# Altium PCB Copy of PCB_Design.PcbDoc
Units mil, origin at the board's own origin, x right, y up, seen from the top; angles counter-clockwise.
Board outline 3200 x 3200 mil, 4 copper layers (L1, L2, L3, L4), stack 1.553 mil thick; 83 components, 55 nets, 293 pads, 204 vias.
Unrouted connection lines stored in the file: 4.
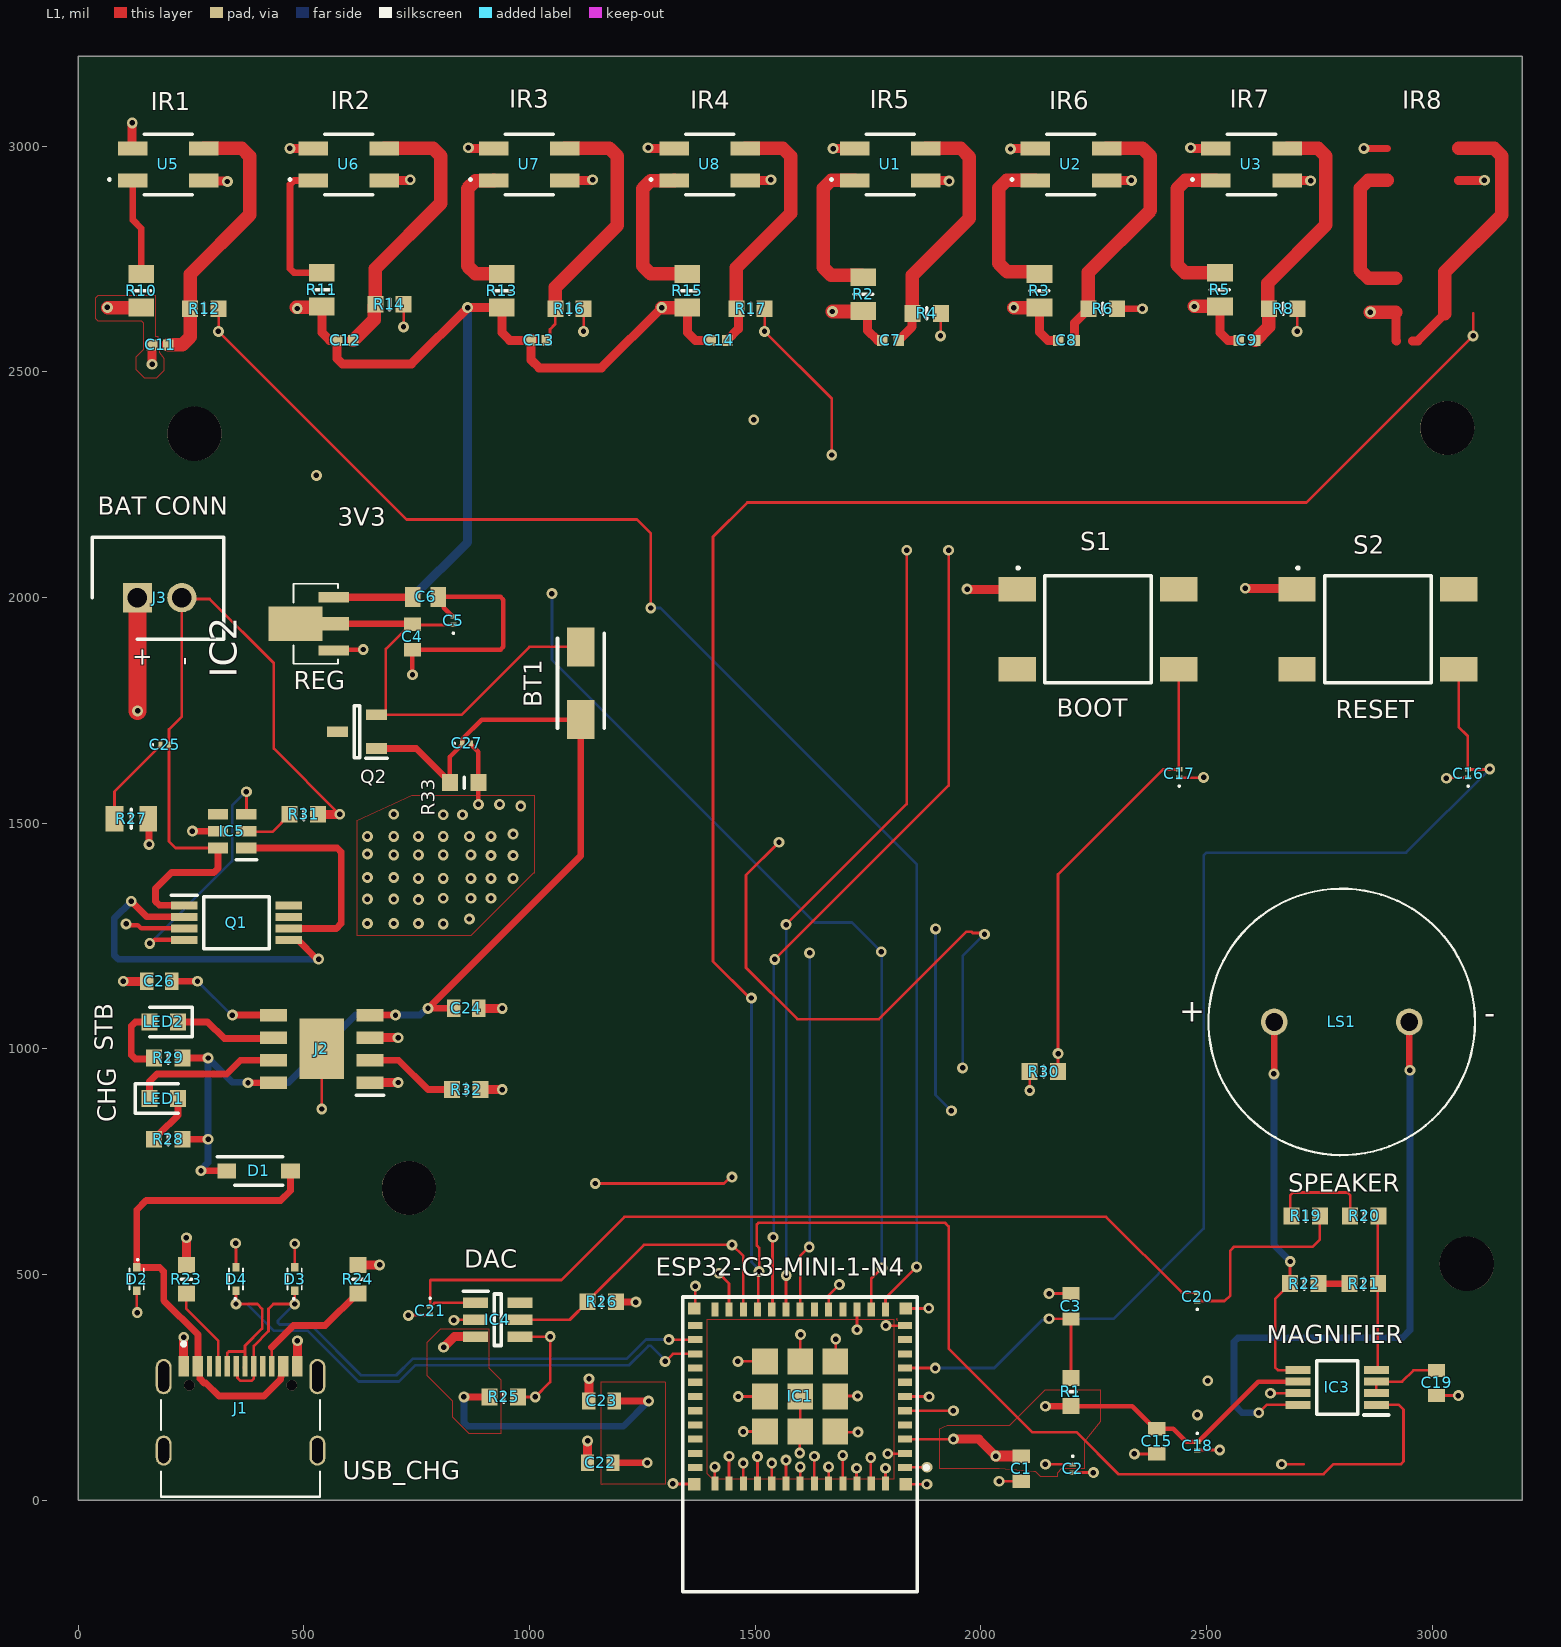
[diagram p0: L1 view]
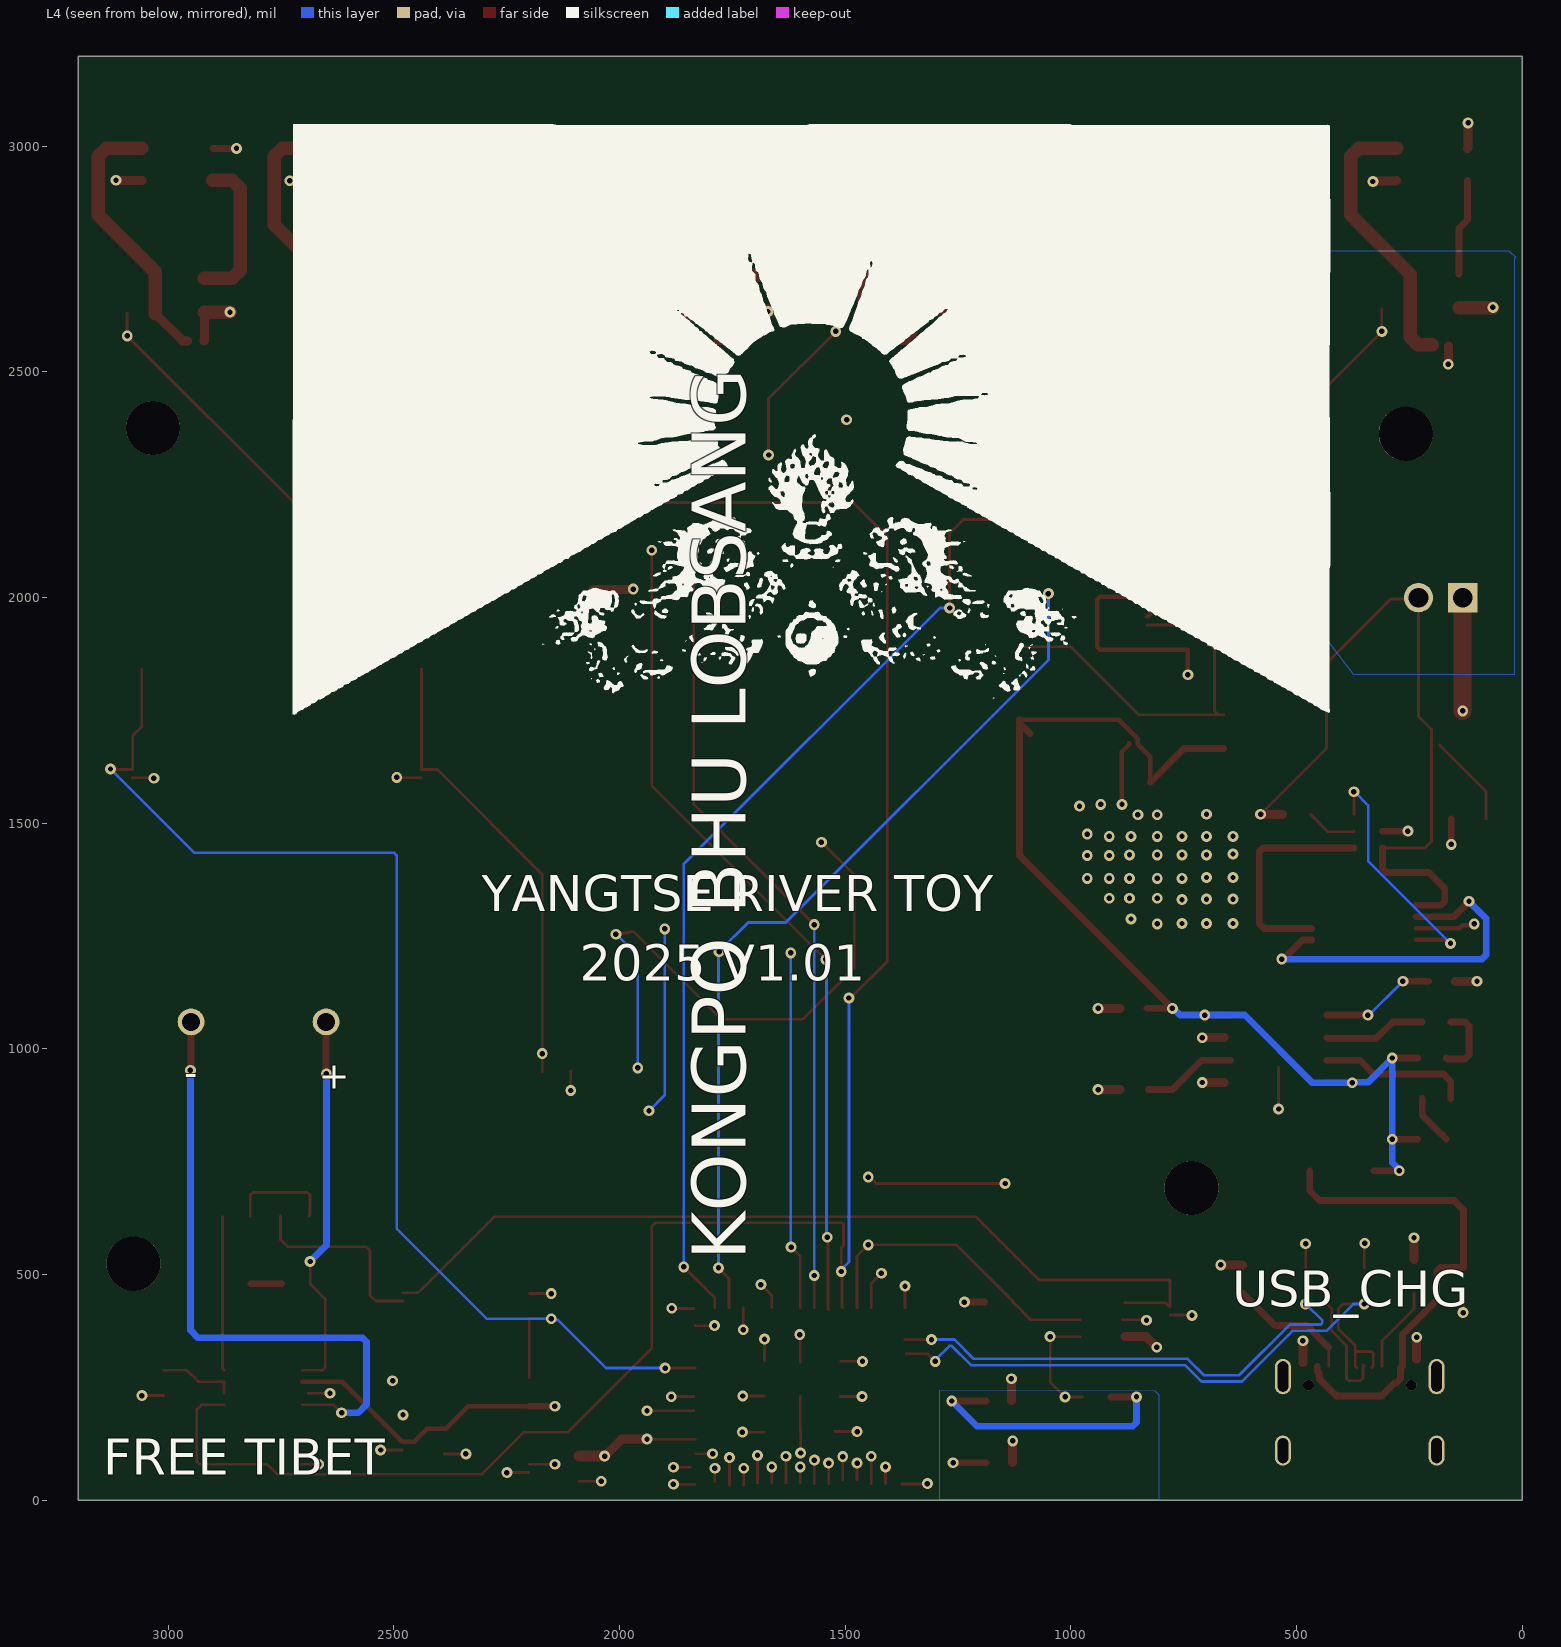
[diagram p1: L4 view, seen from below]
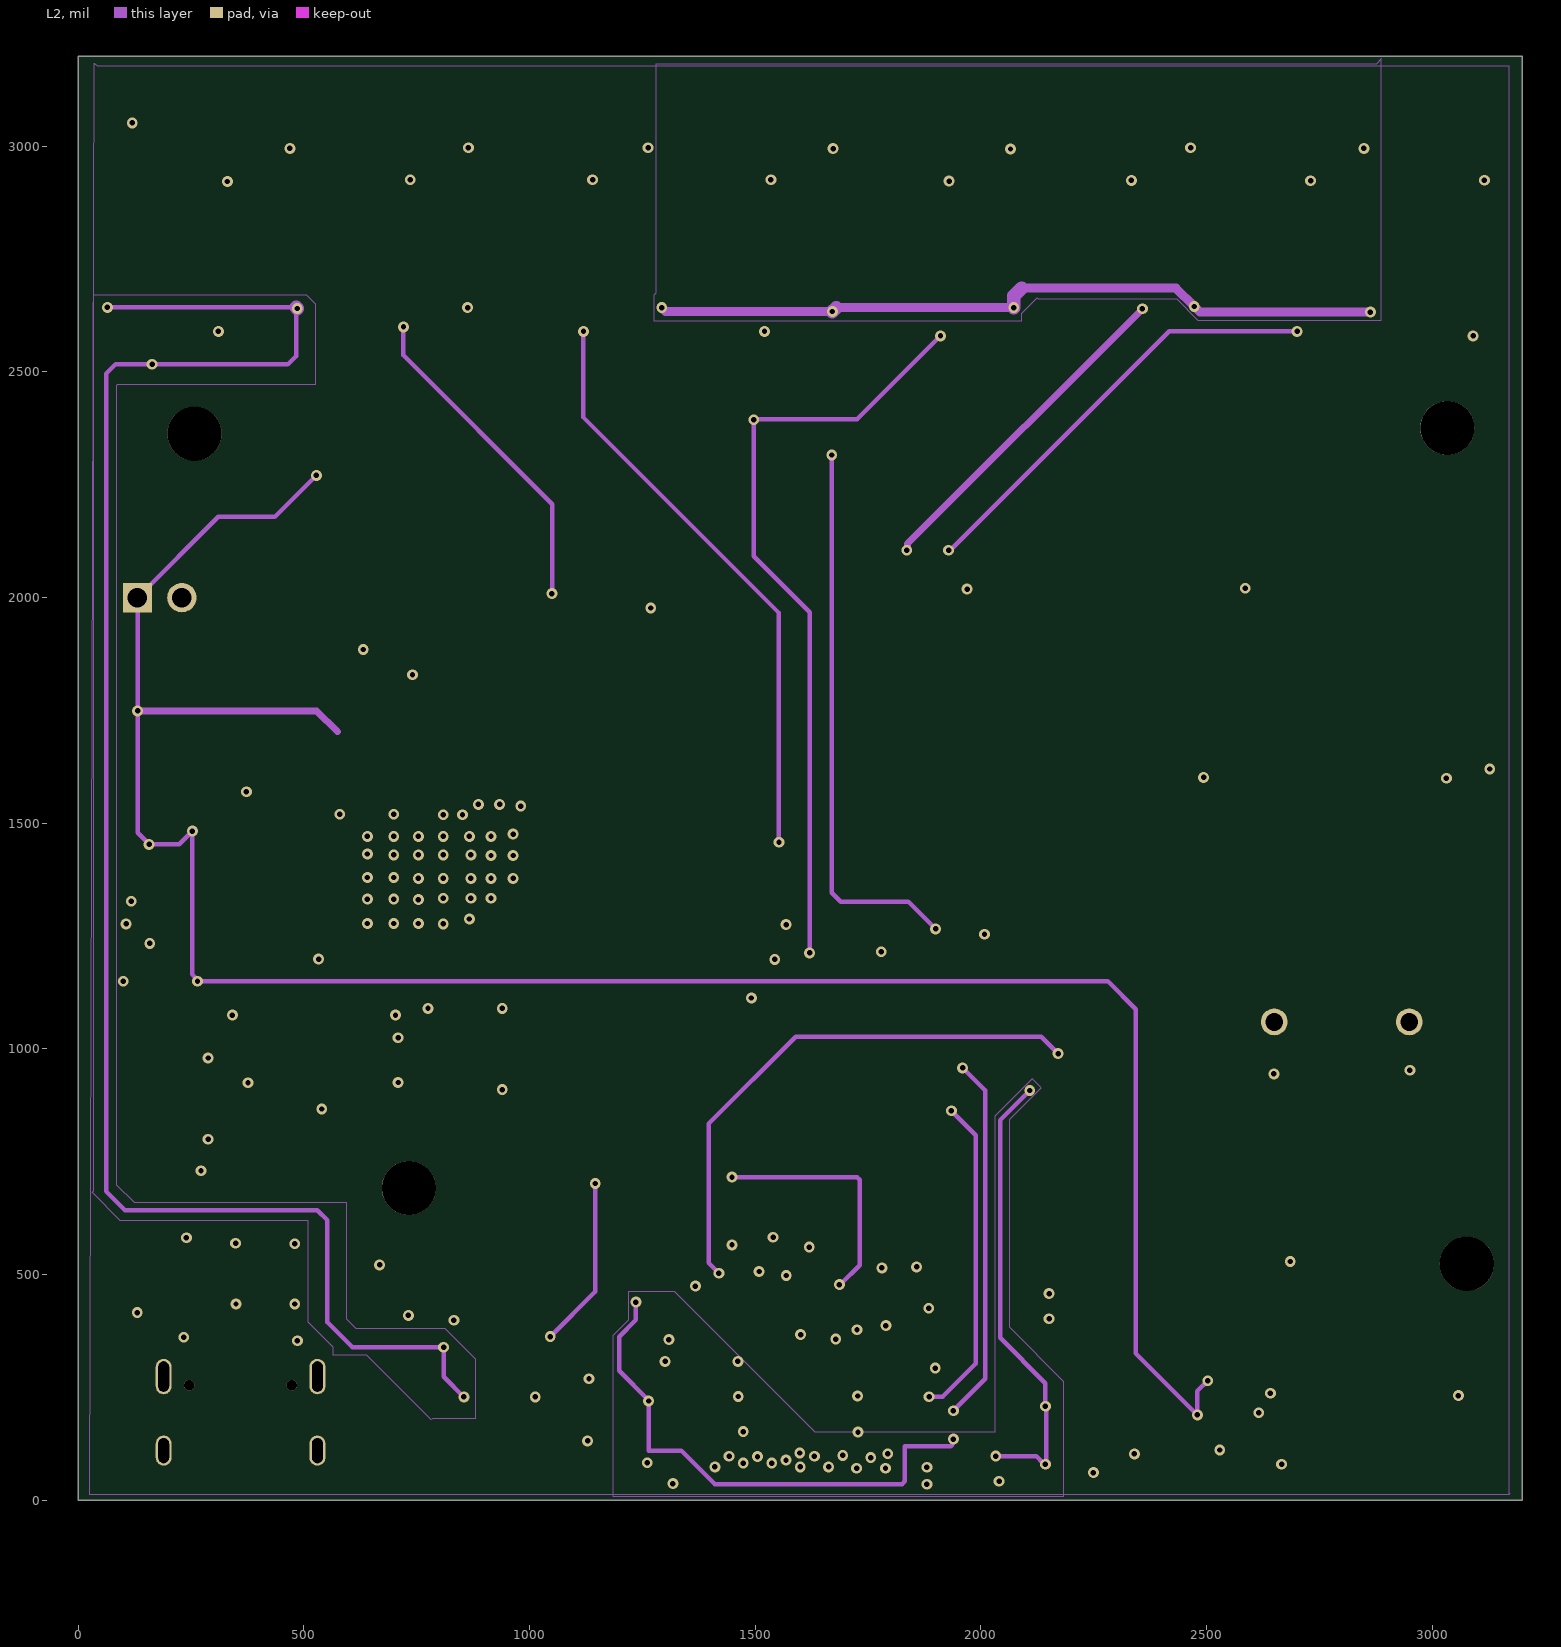
[diagram p2: L2]
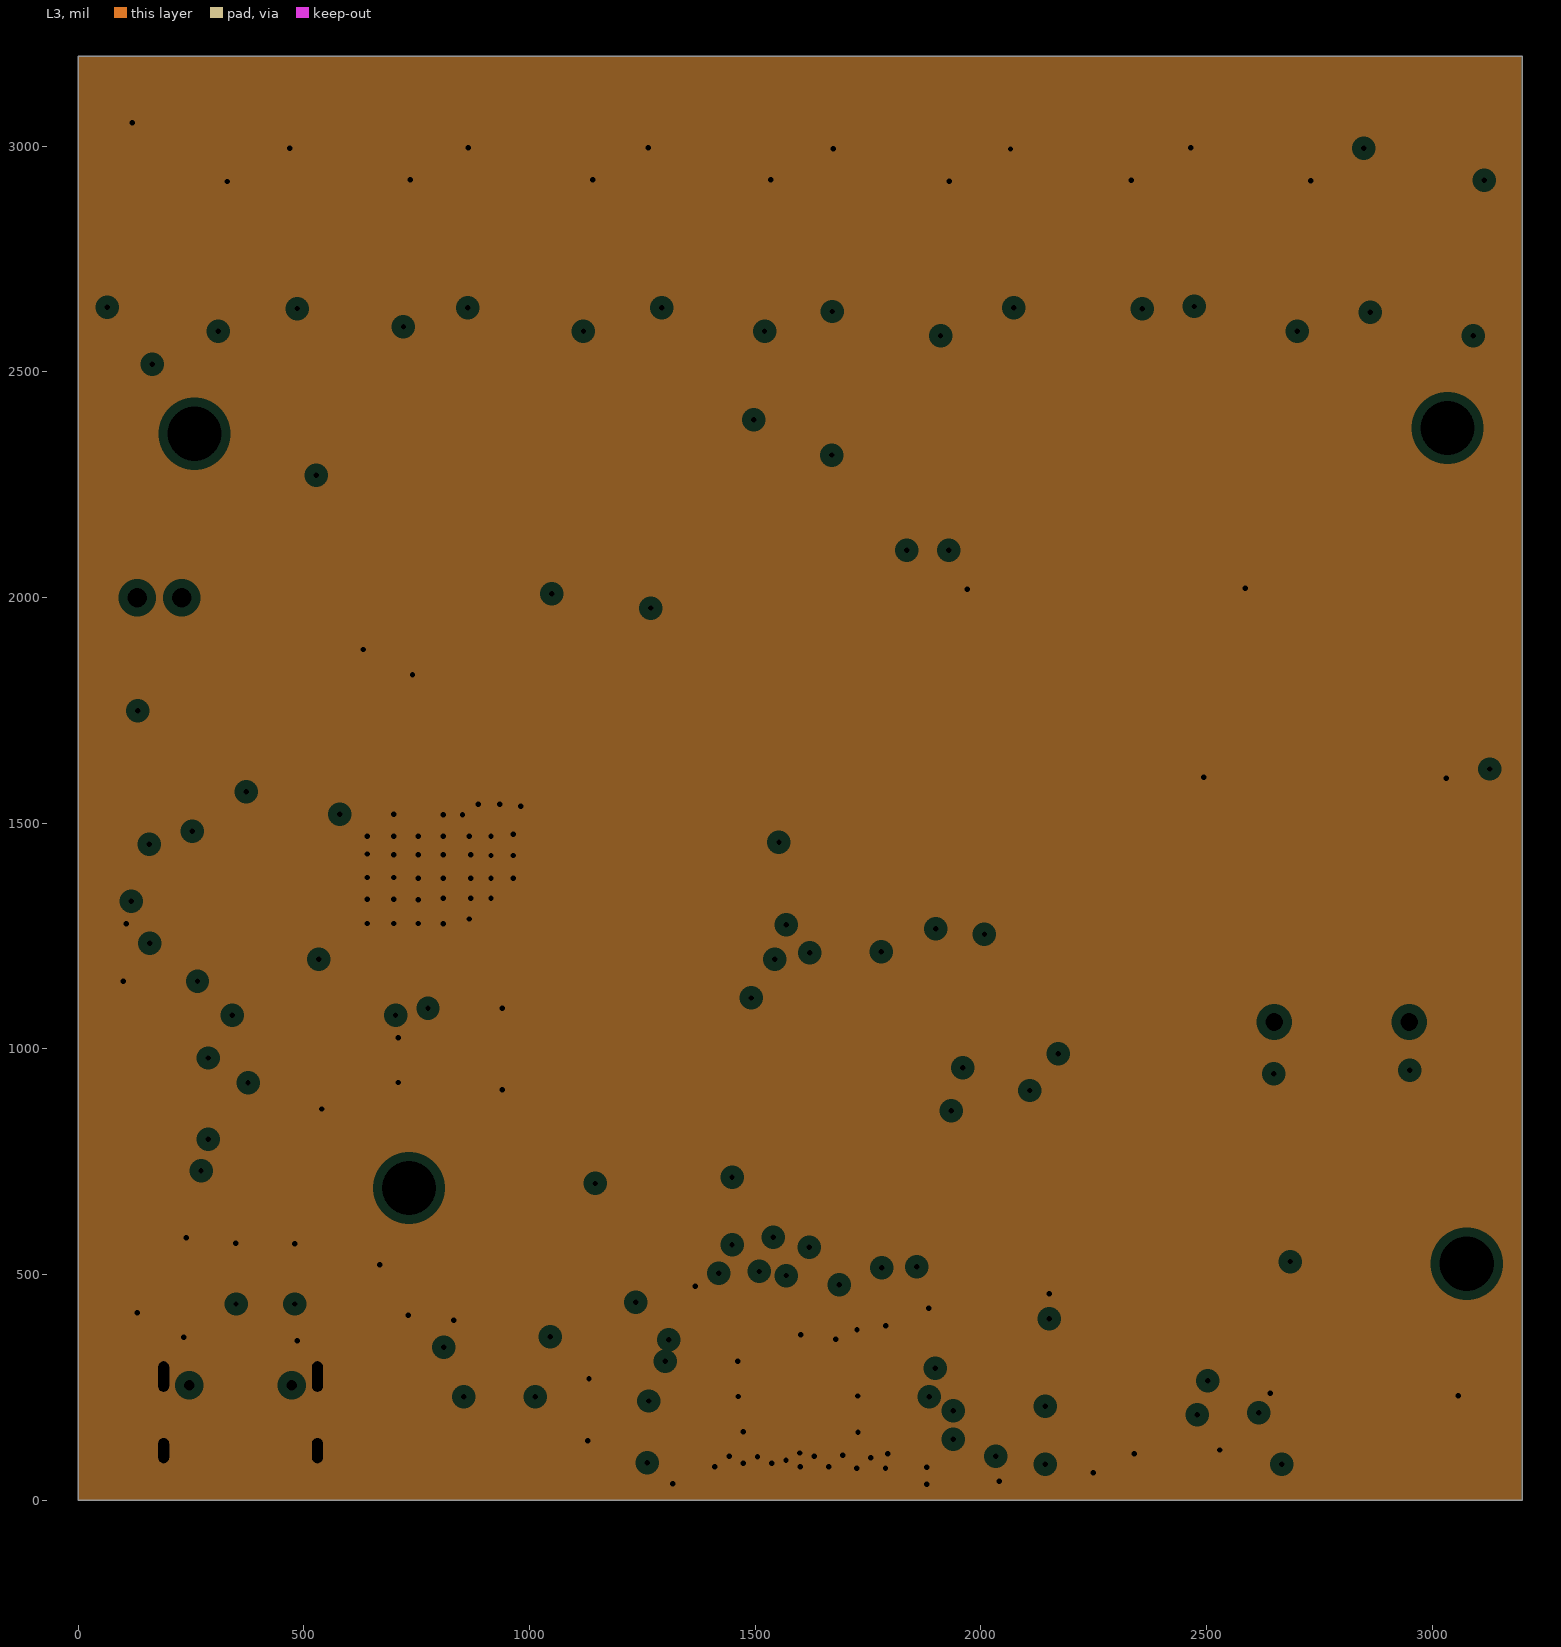
[diagram p3: L3, clearances drawn from the general rule]

## Layer stack, top to bottom
Top Solder: solder mask 0.4, Solder Resist, Dk 3.5
L1: signal copper 0.035
Dielectric 2: prepreg 0.094, PP-006, Dk 4.1
L2: signal copper 0.015
Dielectric 1: dielectric 1.265, FR-4, Dk 4.8
L3: plane copper 0.015, net GND
Dielectric 3: prepreg 0.094, PP-006, Dk 4.1
L4: signal copper 0.035
Bottom Solder: solder mask 0.4, Solder Resist, Dk 3.5

## Board outline
0,0 3200,0 3200,3200 0,3200

## Design rules (kind name [scope] priority, off if disabled: settings)
Clearance [All] p1: gap=7 ignorepadtopadclearanceinfootprint=FALSE
DiffPairsRouting [InDifferentialPair('USB_D')] p1: maxlimit=8.1 minlimit=8 mostfreqgap=8 toplayer_minwidth=6.03 toplayer_maxwidth=6.23 toplayer_prefwidth=6.03 midlayer1_minwidth=5.1 midlayer1_maxwidth=5.2 midlayer1_prefwidth=5.1 bottomlayer_minwidth=6.03 bottomlayer_maxwidth=6.23 bottomlayer_prefwidth=6.03 maxuncoupledlength=500
HoleSize [All] p1: absolutevalues=TRUE maxlimit=150 minlimit=1 maxpercent=80.000 minpercent=20.000
MinimumSolderMaskSliver [All] p1: minsoldermaskwidth=2
PlaneClearance [All] p1: clearance=20
PlaneConnect [All] p1: pad.planeconnectstyle=Relief pad.reliefexpansion=20 pad.reliefentries=4 pad.reliefconductorwidth=10 pad.reliefairgap=10 via.planeconnectstyle=Direct via.reliefexpansion=20 via.reliefentries=4 via.reliefconductorwidth=10 via.reliefairgap=10
PolygonConnect [All] p1: connectstyle=Direct reliefconductorwidth=10 reliefentries=4 polygonreliefangle="90 Angle" airgapwidth=10
RoutingVias [All] p1: holewidth=12 width=24 viastyle="Through Hole" minholewidth=12 minwidth=24 maxholewidth=12 maxwidth=24
SilkToSolderMaskClearance [IsPad] p1: minsilkscreentomaskgap=3.15 clearancetoexposedcopper=TRUE
SolderMaskExpansion [All] p1: expansion=2 istentingtop=FALSE
Width [All] p1: maxlimit=100 minlimit=6 preferedwidth=8 minimp=50.000000 maximp=50.000000 favimp=50.000000
24 further rules are at their usual default settings.

## Classes and differential pairs
differential pair USB_D: +USB_D_P -USB_D_N

## Components (designator, comment, footprint, x,y, rotation, side; value= is the part's Value field where it differs from the comment)
BT1 "SS14" DIOM5026X262N 1114,1810.29 r270 top
C1 "10uF" CAPC1608X95N 2090,70 r270 top
C2 "0.1uF" GRM033D70J224ME01D 2204,70 r270 top
C3 "1uF" CAPC1608X90N 2200,430 r90 top locked
C4 "10uF" CAPC1608X95N 741,1913.05 r270 top
C5 "0.1uF" GRM033D70J224ME01D 831.75,1948.92 r90 top
C6 "22uF" CAPC1608X80N 769.85,2001.5 r0 top
C7 "10nF" CAPC1005X55N 1800,2570 r180 top
C8 "10nF" CAPC1005X55N 2190,2570 r180 top
C9 "10nF" CAPC1005X55N 2590,2570 r180 top
C11 "10nF" CAPC1005X55N 181.89,2560 r180 top
C12 "10nF" CAPC1005X55N 591.89,2570 r180 top
C13 "10nF" CAPC1005X55N 1020.71,2570 r180 top
C14 "10nF" CAPC1005X55N 1420,2570 r180 top
C15 "10uF" CAPC1608X95N 2390,130.67 r270 top locked
C16 "0.1uF" GRM033D70J224ME01D 3080,1610 r90 top locked
C17 "0.1uF" GRM033D70J224ME01D 2440,1610 r90 top locked
C18 "0.1uF" GRM033D70J224ME01D 2480,120.67 r270 top locked
C19 "1uF" CAPC1608X90N 3010,260 r270 top locked
C20 "0.1uF" GRM033D70J224ME01D 2480,450.67 r90 top locked
C21 "0.1uF" GRM033D70J224ME01D 780,420 r270 top
C22 "1uF" CAPC1608X90N 1157,83 r180 top
C23 "10uF" CAPC1608X95N 1160,220 r180 top
C24 "10uF" CAPC1608X95N 860,1090 r0 top locked
C25 "0.1uF" GRM033D70J224ME01D 192,1674 r0 top
C26 "10uF" CAPC1608X95N 180,1150 r180 top locked
C27 "0.1uF" GRM033D70J224ME01D 861,1677 r0 top
D1 "B5819W" SOD3716X135N 400,730 r0 top locked
D2 "LESD5D5.0CT1G" LESD5D50CT1G 130,490 r270 top
D3 "LESD5D5.0CT1G" LESD5D50CT1G 480,490 r90 top
D4 "LESD5D5.0CT1G" LESD5D50CT1G 350,490 r90 top
IC1 "ESP32-C3-MINI-1-N4" ESP32C3MINI1N4 1600,230 r180 top locked
IC2 "AP7365-33YRG-13" AP736533YG13 526.57,1942 r90 top
IC3 "LM4890MM" SOP65P490X110-8N 2790,250 r180 top locked
IC4 "MCP4706A0T-E_CH" SOT95P270X145-6N 930,400 r0 top
IC5 "DW01A-G" SOT95P190X145-6N 341.5,1482.6 r180 top locked
J1 "TYPE-C-31-M-12" HRO_TYPE-C-31-M-12 360,110 r0 top
J2 "TP4056" SOIC127P600X175-9N 540,1000 r180 top locked
J3 "BAT" SHDR2W64P0X250_1X2_740X575X700P 131.57,2000 r0 top
LED1 "CHG" LEDC1608X80N 190,890 r0 top locked
LED2 "STB" LEDC1608X80N 190,1060 r180 top locked
LS1 "CVS-1508" SPKR_CVS-1508 2800,1060 r0 top locked
Q1 "FS8205A" SOP65P640X120-8N 351,1280 r0 top
Q2 "FDN340P" SOT95P237X112-3N 618,1703 r180 top
R1 "10K" RESC1608X55N 2200,240 r270 top locked
R2 "100R" RESC2013X65N 1740,2672.6 r90 top
R3 "100R" RESC2013X65N 2130,2680 r90 top
R4 "220R" RESC1608X55N 1880,2630 r0 top
R5 "100R" RESC2013X65N 2530,2682.6 r90 top
R6 "220R" RESC1608X55N 2270,2640 r0 top
R8 "220R" RESC1608X55N 2670,2640 r0 top
R10 "100R" RESC2013X65N 140,2680 r90 top
R11 "100R" RESC2013X65N 540,2682.6 r90 top
R12 "220R" RESC1608X55N 280,2640 r0 top
R13 "100R" RESC2013X65N 938.82,2680 r90 top
R14 "220R" RESC1608X55N 690,2650 r0 top
R15 "100R" RESC2013X65N 1350,2680 r90 top
R16 "220R" RESC1608X55N 1088.82,2640 r0 top
R17 "220R" RESC1608X55N 1490,2640 r0 top
R19 "10K" RESC1608X55N 2720,630 r180 top locked
R20 "10K" RESC1608X55N 2850,630 r180 top locked
R21 "10K" RESC1608X55N 2848.5,480 r180 top locked
R22 "10K" RESC1608X55N 2717.01,480 r180 top locked
R23 "5K1" RESC1608X55N 240,490 r90 top
R24 "5K1" RESC1608X55N 620,490 r90 top
R25 "10K" RESC1608X55N 943,229 r180 top
R26 "10K" RESC1608X55N 1160,440 r0 top
R27 "100R" RESC2013X65N 118,1510 r180 top locked
R28 "1K" RESC1608X55N 200,800 r180 top locked
R29 "1K" RESC1608X55N 200,980 r180 top locked
R30 "10K" RESC1608X55N 2140,950 r0 top locked
R31 "1K" RESC1608X55N 500,1520 r0 top locked
R32 "2K" RESC1608X55N 860,910 r0 top locked
R33 "CR0603-FX-1003GLF" RESC1608X55N 855.5,1590 r0 top
S1 "BOOT" 414375652 2260,1930 r90 top locked
S2 "RESET" 414375652 2880,1930 r90 top locked
U1 "QRE1113GR" QRE1113GR 1800,2960 r0 top
U2 "QRE1113GR" QRE1113GR 2200,2960 r0 top
U3 "QRE1113GR" QRE1113GR 2600,2960 r0 top
U5 "QRE1113GR" QRE1113GR 200,2960 r0 top
U6 "QRE1113GR" QRE1113GR 600,2960 r0 top
U7 "QRE1113GR" QRE1113GR 1000,2960 r0 top
U8 "QRE1113GR" QRE1113GR 1400,2960 r0 top

## Footprints (in the part's own frame and the unit in brackets; to place one, negate y for a bottom-side part, rotate by r counter-clockwise, add the part's x,y. Pads: shape width x height; smd on the part's side, far side on the other; paste and mask are expansions set on the pad)
414375652 [mm]
  rect 1.4x2.1 smd: 1(2.25,4.55) 2(2.25,-4.55) 3(-2.25,4.55) 4(-2.25,-4.55)
  silkscreen extent -3,-3 3.5,4.55, body extent -3,-5 3,5, height 5.07
AP736533YG13 [mm]
  rect 0.58x1.73 smd: 1(-1.5,-1.017) 3(1.5,-1.017)
  rect 0.76x1.5 smd: 2(0,-1.132)
  rect 1.933x3.03 smd: 4(0,1.132)
  silkscreen extent -2.25,-1.25 2.25,1.25, body extent -2.25,-1.25 2.25,1.25, height 1.7
CAPC1005X55N [mm]
  rect 0.6x0.62 smd: 1(-0.46,0) 2(0.46,0)
  body extent -0.52,-0.28 0.53,0.27, height 0.55
CAPC1608X80N [mm]
  rect 0.87x1.12 smd: 1(-0.72,0) 2(0.72,0)
  body extent -0.8,-0.4 0.8,0.4, height 0.8
CAPC1608X90N [mm]
  rect 0.73x0.94 smd: 1(-0.71,0) 2(0.71,0)
  body extent -0.8,-0.4 0.8,0.4, height 0.9
CAPC1608X95N [mm]
  rect 0.76x0.98 smd: 1(-0.71,0) 2(0.71,0)
  body extent -0.8,-0.4 0.8,0.4, height 0.95
DIOM5026X262N [mm]
  rect 2.2x1.55 smd: 1(-2.05,0) 2(2.05,0)
  silkscreen extent -2.83,-1.31 2.52,1.31, body extent -2.52,-1.31 2.52,1.31, height 2.62
ESP32C3MINI1N4 [mm]
  rect 0.8x0.4 smd: 1(-5.9,4) 2(-5.9,3.2) 3(-5.9,2.4) 4(-5.9,1.6) 5(-5.9,0.8) 6(-5.9,0) 7(-5.9,-0.8) 8(-5.9,-1.6) 9(-5.9,-2.4) 10(-5.9,-3.2) 11(-5.9,-4) 25(5.9,-4) 26(5.9,-3.2) 27(5.9,-2.4) 28(5.9,-1.6) 29(5.9,-0.8) 30(5.9,0) 31(5.9,0.8) 32(5.9,1.6) 33(5.9,2.4) 34(5.9,3.2) 35(5.9,4)
  rect 0.4x0.8 smd: 12(-4.8,-4.9) 13(-4,-4.9) 14(-3.2,-4.9) 15(-2.4,-4.9) 16(-1.6,-4.9) 17(-0.8,-4.9) 18(0,-4.9) 19(0.8,-4.9) 20(1.6,-4.9) 21(2.4,-4.9) 22(3.2,-4.9) 23(4,-4.9) 24(4.8,-4.9) 36(4.8,4.9) 37(4,4.9) 38(3.2,4.9) 39(2.4,4.9) 40(1.6,4.9) 41(0.8,4.9) 42(0,4.9) 43(-0.8,4.9) 44(-1.6,4.9) 45(-2.4,4.9) 46(-3.2,4.9) 47(-4,4.9) 48(-4.8,4.9)
  rect 1.45x1.45 smd: 49(0,0) 50(1.975,1.975) 51(0,1.975) 52(-1.975,1.975) 53(-1.975,0) 54(-1.975,-1.975) 55(0,-1.975) 56(1.975,-1.975) 57(1.975,0)
  rect 0.7x0.7 smd: 58(-5.95,4.95) 59(-5.95,-4.95) 60(5.95,-4.95) 61(5.95,4.95)
  silkscreen extent -7.2,-5.6 6.6,11, body extent -6.6,-5.6 6.6,11, height 2.4
GRM033D70J224ME01D [mm]
  rect 0.25x0.35 smd: 1(-0.237,0) 2(0.237,0)
  silkscreen extent -0.75,-0.05 -0.65,0.05, body extent -0.3,-0.15 0.3,0.15, height 0.3
HRO_TYPE-C-31-M-12 [mm]
  rect 0.6x1.14 smd mask+0.05: A1_B12(-3.2,4.75) A4_B9(-2.4,4.75) B1_A12(3.2,4.75) B4_A9(2.4,4.75)
  rect 0.3x1.14 smd mask+0.05: A5(-1.25,4.75) A6(-0.25,4.75) A7(0.25,4.75) A8(1.25,4.75) B5(1.75,4.75) B6(0.75,4.75) B7(-0.75,4.75) B8(-1.75,4.75)
  oval 0.9x2 hole 0.6 slot 1.7 at 90 deg: S1(-4.325,4.17) S2(4.325,4.17)
  oval 0.9x1.7 hole 0.6 slot 1.4 at 90 deg: S3(-4.325,0) S4(4.325,0)
  round 0.6 hole 0.6 unplated: ""(-2.89,3.68) ""(2.89,3.68)
  silkscreen extent -4.47,-2.6 4.47,6.1, body extent -4.47,-2.6 4.47,5.31, height 3.31
LEDC1608X80N [mm]
  rect 0.9x0.95 smd: 1(-0.8,0) 2(0.8,0)
  silkscreen extent -1.6,-0.82 0.8,0.82, body extent -0.83,-0.4 0.77,0.4, height 0.8
LESD5D50CT1G [mm]
  rect 0.48x0.4 smd: 1(-0.66,0) 2(0.66,0)
  silkscreen extent -1.15,-0.4 0.6,0.4, body extent -0.8,-0.4 0.8,0.4, height 0.6
QRE1113GR [mm]
  rect 1.66x0.79 smd: 1(-2,-0.9) 2(2,-0.9) 3(2,0.9) 4(-2,0.9)
  silkscreen extent -3.35,-1.7 1.35,1.7, body extent -2.4,-2.04 2.4,1.56, height 1.87
RESC1608X55N [mm]
  rect 0.9x0.95 smd: 1(-0.8,0) 2(0.8,0)
  silkscreen extent 0,-0.3 0,0.3, body extent -0.82,-0.4 0.82,0.4, height 0.5
RESC2013X65N [mm]
  rect 1x1.45 smd: 1(-0.95,0) 2(0.95,0)
  silkscreen extent 0,-0.54 0,0.54, body extent -1,-0.64 1,0.64, height 0.65
SHDR2W64P0X250_1X2_740X575X700P [mm]
  rect 1.65x1.65 hole 1.1: 1(0,0)
  round 1.65 hole 1.1: 2(2.5,0)
  silkscreen extent -2.54,-2.35 4.86,3.4, body extent -2.54,-2.35 4.86,3.4, height 7
SOD3716X135N [mm]
  rect 1.05x0.85 smd: 1(-1.8,0) 2(1.8,0)
  silkscreen extent -2.33,-0.8 1.35,0.8, body extent -1.85,-0.27 1.85,0.27, height 0.74
SOIC127P600X175-9N [mm]
  rect 1.525x0.7 smd: 1(-2.712,1.905) 2(-2.712,0.635) 3(-2.712,-0.635) 4(-2.712,-1.905) 5(2.712,-1.905) 6(2.712,-0.635) 7(2.712,0.635) 8(2.712,1.905)
  rect 2.513x3.402 smd: 9(0,0)
  silkscreen extent -3.48,2.61 -1.95,2.61, body extent -3,-2.45 3,2.45, height 1.75
SOP65P490X110-8N [mm]
  rect 1.4x0.45 smd: 1(-2.2,0.975) 2(-2.2,0.325) 3(-2.2,-0.325) 4(-2.2,-0.975) 5(2.2,-0.975) 6(2.2,-0.325) 7(2.2,0.325) 8(2.2,0.975)
  silkscreen extent -2.9,-1.5 1.15,1.55, body extent -2.45,-1.5 2.45,1.5, height 1.1
SOP65P640X120-8N [mm]
  rect 1.475x0.45 smd: 1(-2.938,0.975) 2(-2.938,0.325) 3(-2.938,-0.325) 4(-2.938,-0.975) 5(2.938,-0.975) 6(2.938,-0.325) 7(2.938,0.325) 8(2.938,0.975)
  silkscreen extent -3.67,-1.47 1.85,1.55, body extent -3.2,-1.47 3.2,1.47, height 1.2
SOT95P190X145-6N [mm]
  rect 1.15x0.6 smd: 1(-0.8,0.95) 2(-0.8,0) 3(-0.8,-0.95) 4(0.8,-0.95) 5(0.8,0) 6(0.8,0.95)
  silkscreen extent -1.38,1.6 -0.22,1.6, body extent -1.5,-1.53 1.5,1.53, height 1.45
SOT95P237X112-3N [mm]
  rect 1.2x0.6 smd: 1(-1.1,0.95) 2(-1.1,-0.95) 3(1.1,0)
  silkscreen extent -1.7,-1.46 0.15,1.5, body extent -1.18,-1.46 1.18,1.46, height 1.12
SOT95P270X145-6N [mm]
  rect 1.4x0.6 smd: 1(-1.25,0.95) 2(-1.25,0) 3(-1.25,-0.95) 4(1.25,-0.95) 5(1.25,0) 6(1.25,0.95)
  silkscreen extent -1.95,-1.45 0.2,1.6, body extent -1.35,-1.45 1.35,1.45, height 1.45
SPKR_CVS-1508 [mm]
  round 1.508 hole 1: M(3.8,0) P(-3.8,0)
  silkscreen extent -7.5,-7.5 7.5,7.5, body extent -7.37,-7.5 7.63,8.5, height 7.6

## Part data
BT1: "Battery", Manufacturer_Name="HY Electronic", Datasheet Link=http://uk.rs-online.com/web/p/products/1711446, Height=2.62mm, Manufacturer_Part_Number=SS14
C1 C4 C15 C23 C24 C26: library part CL10A106MO8NQNC, "Capacitor", LCSC Part Number=C92487, Manufacturer_Name=SAMSUNG, Mouser Part Number=187-CL10A106MO8NQNC, Arrow Part Number=CL10A106MO8NQNC, Arrow Price/Stock=https://www.arrow.com/en/products/cl10a106mo8nqnc/samsung-electro-mechanics?region=nac, Datasheet Link=https://product.samsungsem.com/mlcc/CL10A106MO8NQN.do, Height=0.95mm, Manufacturer_Part_Number=CL10A106MO8NQNC, Mouser Price/Stock=https://www.mouser.co.uk/ProductDetail/Samsung-Electro-Mechanics/CL10A106MO8NQNC?qs=X6jEic%2FHinCV9WAzCvTcwg%3D%3D
C2 C5 C16 C17 C18 C20 C21 C25 C27: library part GRM033Z71C104KE14J, "Capacitor", LCSC Part Number=C5755505, Manufacturer_Name="Murata Electronics", Mouser Part Number=81-GRM033Z71C104KE4J, Datasheet Link=https://search.murata.co.jp/Ceramy/image/img/A01X/G101/ENG/GRM033Z71C104KE14-01A.pdf, Height=0.33mm, Manufacturer_Part_Number=GRM033Z71C104KE14J, Mouser Price/Stock=https://www.mouser.co.uk/ProductDetail/Murata-Electronics/GRM033Z71C104KE14J?qs=lEfY3O89AqkOnRdov738ag%3D%3D
C3 C19 C22: library part CL10A105KP8NNNC, "Capacitor", LCSC Part Number=C26413, Manufacturer_Name=SAMSUNG, Mouser Part Number=187-CL10A105KP8NNNC, Arrow Part Number=CL10A105KP8NNNC, Arrow Price/Stock=https://www.arrow.com/en/products/cl10a105kp8nnnc/samsung-electro-mechanics?region=europe, Datasheet Link=https://datasheet.lcsc.com/szlcsc/Samsung-Electro-Mechanics-CL10A105KP8NNNC_C26413.pdf, Height=0.9mm, Manufacturer_Part_Number=CL10A105KP8NNNC, Mouser Price/Stock=https://www.mouser.co.uk/ProductDetail/Samsung-Electro-Mechanics/CL10A105KP8NNNC?qs=349EhDEZ59qtu6tL%2F73n2A%3D%3D
C6: library part CL10A226MO7JZNC, "Capacitor", LCSC Part Number=C2762594, Manufacturer_Name=SAMSUNG, Mouser Part Number=187-CL10A226MO7JZNC, Arrow Part Number=CL10A226MO7JZNC, Arrow Price/Stock=https://www.arrow.com/en/products/cl10a226mo7jznc/samsung-electro-mechanics?utm_currency=USD&region=europe, Datasheet Link=https://www.mouser.es/datasheet/2/585/MLCC-1837944.pdf, Height=0.8mm, Manufacturer_Part_Number=CL10A226MO7JZNC, Mouser Price/Stock=https://www.mouser.co.uk/ProductDetail/Samsung-Electro-Mechanics/CL10A226MO7JZNC?qs=xZ%2FP%252Ba9zWqb2i0I9rwAjeg%3D%3D
C7 C8 C9 C11 C12 C13 C14: library part CC0402KRX7R5BB103, "Capacitor", Manufacturer_Name=KEMET, Mouser Part Number=603-CC0402KRX7R5BB10, Datasheet Link=https://componentsearchengine.com/Datasheets/1/CC0402KRX7R5BB103.pdf, Height=0.55mm, Manufacturer_Part_Number=CC0402KRX7R5BB103, Mouser Price/Stock=https://www.mouser.com/Search/Refine.aspx?Keyword=603-CC0402KRX7R5BB10
D1: "Diode", Manufacturer_Name=Good-Ark, Arrow Part Number=B5819W, Arrow Price/Stock=https://www.arrow.com/en/products/b5819w/good-ark-semiconductor?utm_currency=USD&region=nac, Datasheet Link=https://www.mouser.com/ds/2/258/B5817W-B5819W(SOD-123)-276623.pdf, Height=1.35mm, Manufacturer_Part_Number=B5819W
D2 D3 D4: "TVS Diode (Bi-directional)", Manufacturer_Name=LRC, Height=0.7mm, Manufacturer_Part_Number=LESD5D5.0CT1G
IC1: "Integrated Circuit", LCSC Part Number=C2838502, Manufacturer_Name="Espressif Systems", Mouser Part Number=356-ESP32-C3-MINI1N4, Datasheet Link=https://www.mouser.com/datasheet/2/891/Espressif_ESP32_C3_MINI_1_Datasheet-2006822.pdf, Height=2.55mm, Manufacturer_Part_Number=ESP32-C3-MINI-1-N4, Mouser Price/Stock=https://www.mouser.co.uk/ProductDetail/Espressif-Systems/ESP32-C3-MINI-1-N4?qs=stqOd1AaK7%252B%2FpH3qqyGehA%3D%3D
IC2: "Integrated Circuit", Manufacturer_Name="Diodes Incorporated", Mouser Part Number=621-AP7365-33YRG-13, Datasheet Link=https://www.diodes.com//assets/Datasheets/products_inactive_data/AP7365.pdf, Height=1.6mm, Manufacturer_Part_Number=AP7365-33YRG-13, Mouser Price/Stock=https://www.mouser.co.uk/ProductDetail/Diodes-Incorporated/AP7365-33YRG-13?qs=abZ1nkZpTuM6iU77d8ddPA%3D%3D
IC3: "Integrated Circuit", Manufacturer_Name="Texas Instruments", Mouser Part Number=926-LM4890MM, Datasheet Link=https://www.ti.com/lit/ds/symlink/lm4890.pdf?ts=1634792281842&ref_url=https%253A%252F%252Fwww.google.com%252F, Height=1.1mm, Manufacturer_Part_Number=LM4890MM, Mouser Price/Stock=https://www.mouser.co.uk/ProductDetail/Texas-Instruments/LM4890MM?qs=QbsRYf82W3FbQ20Kj%2FLeow%3D%3D
IC4: "Integrated Circuit", Arrow Part Number=MCP4706A0T-E/CH, LCSC Part Number=C2649360, Manufacturer_Name=Microchip, Mouser Part Number=579-MCP4706A0TECH, Arrow Price/Stock=https://www.arrow.com/en/products/mcp4706a0t-ech/microchip-technology?region=nac, Datasheet Link=http://ww1.microchip.com/downloads/en/DeviceDoc/22272C.pdf, Height=1.45mm, Manufacturer_Part_Number=MCP4706A0T-E/CH, Mouser Price/Stock=https://www.mouser.co.uk/ProductDetail/Microchip-Technology-Atmel/MCP4706A0T-E-CH?qs=ggQiQSXuoRUkD%252B70FRFHMA%3D%3D
IC5: "Integrated Circuit", Manufacturer_Name="SII Semiconductor", Datasheet Link=http://www.ic-fortune.com/upload/Download/DW01x-DS-17_EN.pdf, Height=1.45mm, Manufacturer_Part_Number=DW01A-G
J1: "USB Connectors 24 Receptacle 1 8.94*7.3mm RoHS", Package=Package, Check_prices=https://www.snapeda.com/parts/TYPE-C-31-M-12/HRO+Electronics+Co.%252C+Ltd./view-part/?ref=eda, MF="HRO Electronics Co., Ltd.", MP=TYPE-C-31-M-12, SnapEDA_Link=https://www.snapeda.com/parts/TYPE-C-31-M-12/HRO+Electronics+Co.%252C+Ltd./view-part/?ref=snap
J2: "Connector", Manufacturer_Name="NanJing Top Power", Datasheet Link=https://dlnmh9ip6v2uc.cloudfront.net/datasheets/Prototyping/TP4056.pdf, Height=1.75mm, Manufacturer_Part_Number=TP4056
J3: library part B2B-XH-A_LF__SN_, "Connector", Arrow Part Number=B2B-XH-A(LF)(SN), Manufacturer_Name="JST (JAPAN SOLDERLESS TERMINALS)", Mouser Part Number=306-B2BXHALFSNP, Arrow Price/Stock=https://www.arrow.com/en/products/b2b-xh-a-lf-sn/jst-manufacturing?utm_currency=USD&region=europe, Datasheet Link=http://www.jst-mfg.com/product/pdf/eng/eXH.pdf, Height=7mm, Manufacturer_Part_Number=B2B-XH-A(LF)(SN), Mouser Price/Stock=https://www.mouser.co.uk/ProductDetail/JST-Commercial/B2B-XH-ALFSN?qs=cdbOS8ANM9DdcSn9qRmfCw%3D%3D
LED1 LED2: library part LTST-C190KRKT, "LED", Manufacturer_Name=Lite-On, Mouser Part Number=859-LTST-C190KRKT, Arrow Part Number=LTST-C190KRKT, Arrow Price/Stock=https://www.arrow.com/en/products/ltst-c190krkt/lite-on-technology?utm_currency=USD&region=europe, Datasheet Link=https://componentsearchengine.com/Datasheets/1/LTST-C190KRKT.pdf, Height=0.8mm, Manufacturer_Part_Number=LTST-C190KRKT, Mouser Price/Stock=https://www.mouser.co.uk/ProductDetail/LITEON/LTST-C190KRKT?qs=kAD5fFa1n5VY3YYNWPC1Fg%3D%3D
LS1: "15 mm, Round Frame, 0.3 W, 8 Ohm, Neodymium Magnet, Mylar Cone", Package="CUI Inc.", CUI_purchase_URL=https://www.cuidevices.com/product/audio/speakers/miniature-_10-mm~40-mm_/cvs-1508?utm_source=snapeda.com&utm_medium=referral&utm_campaign=snapedaBOM, Digi-Key_Part_Number=102-2498-ND, DigiKey-Purchase-URL=https://snapeda.com/shop?store=DigiKey&id=681641, MF="CUI Devices", MP=CVS-1508, SnapEDA_Link=https://www.snapeda.com/parts/CVS-1508/CUI%20Devices/view-part/681641/?ref=snap
Q1: "MOSFET (N-Channel)", Manufacturer_Name="TECH PUBLIC", Datasheet Link=http://www.techpublic.com.tw/pdf/FS8205A.pdf, Height=1.25mm, Manufacturer_Part_Number=FS8205A
Q2: "MOSFET (P-Channel)", Manufacturer_Name=onsemi, Mouser Part Number=512-FDN340P, Arrow Part Number=FDN340P, Arrow Price/Stock=https://www.arrow.com/en/products/fdn340p/on-semiconductor?utm_currency=USD&region=nac, Datasheet Link=https://www.onsemi.com/pub/Collateral/FDN340P-D.PDF, Height=1.12mm, Manufacturer_Part_Number=FDN340P, Mouser Price/Stock=https://www.mouser.co.uk/ProductDetail/onsemi-Fairchild/FDN340P?qs=AMp2PTjoga9dhzFXRaqTZw%3D%3D
R1 R19 R20 R21 R22 R25 R26 R30: library part 0603WAF1002T5E, "Resistor", LCSC Part Number=C25804, Manufacturer_Name=ROYALOHM, Mouser Part Number=303-0603WAF1002T5E, Datasheet Link=https://th.mouser.com/datasheet/2/1365/1-3044649.pdf, Height=0.55mm, Manufacturer_Part_Number=0603WAF1002T5E, Mouser Price/Stock=https://www.mouser.co.uk/ProductDetail/Royalohm/0603WAF1002T5E?qs=e8oIoAS2J1TC2D0IjbSyGA%3D%3D
R2 R3 R5 R10 R11 R13 R15 R27: library part 0805W8F1000T5E, "Resistor", LCSC Part Number=C17408, Manufacturer_Name="UNI-ROYAL(Uniroyal Elec)", Datasheet Link=https://datasheet.lcsc.com/szlcsc/Uniroyal-Elec-0805W8F1000T5E_C17408.pdf, Height=0.65mm, Manufacturer_Part_Number=0805W8F1000T5E
R4 R6 R8 R12 R14 R16 R17: library part RC0603FR-07220RL, "Resistor", LCSC Part Number=C107696, Manufacturer_Name=KEMET, Mouser Part Number=603-RC0603FR-07220RL, Arrow Part Number=RC0603FR-07220RL, Arrow Price/Stock=https://www.arrow.com/en/products/rc0603fr-07220rl/yageo?region=nac, Datasheet Link=http://www.yageo.com/documents/recent/PYu-RC0603_51_RoHS_L_v5.pdf, Height=0.55mm, Manufacturer_Part_Number=RC0603FR-07220RL, Mouser Price/Stock=https://www.mouser.co.uk/ProductDetail/YAGEO/RC0603FR-07220RL?qs=VU8sRB4EgwA1IyQ0vhXEEw%3D%3D
R23 R24: library part 0603WAF5101T5E, "Resistor", Manufacturer_Name="UNI-ROYAL(Uniroyal Elec)", Datasheet Link=https://datasheet.lcsc.com/szlcsc/Uniroyal-Elec-0603WAF5101T5E_C23186.pdf, Height=0.55mm, Manufacturer_Part_Number=0603WAF5101T5E
R28 R29 R31: library part 0603WAF1002T5E, "Resistor", Manufacturer_Name=ROYALOHM, Mouser Part Number=303-0603WAF1002T5E, Datasheet Link=https://th.mouser.com/datasheet/2/1365/1-3044649.pdf, Height=0.55mm, Manufacturer_Part_Number=0603WAF1002T5E, Mouser Price/Stock=https://www.mouser.co.uk/ProductDetail/Royalohm/0603WAF1002T5E?qs=e8oIoAS2J1TC2D0IjbSyGA%3D%3D
R32: library part ERJ-3EKF2001V, "Resistor", Manufacturer_Name=Panasonic, Mouser Part Number=667-ERJ-3EKF2001V, Arrow Part Number=ERJ-3EKF2001V, Arrow Price/Stock=https://www.arrow.com/en/products/erj-3ekf2001v/panasonic?utm_currency=USD&region=nac, Datasheet Link=http://industrial.panasonic.com/cdbs/www-data/pdf/RDA0000/AOA0000C86.pdf, Height=0.55mm, Manufacturer_Part_Number=ERJ-3EKF2001V, Mouser Price/Stock=https://www.mouser.co.uk/ProductDetail/Panasonic/ERJ-3EKF2001V?qs=66DK8nO8gJB6oRfYYGuuZQ%3D%3D
R33: "Resistor", Manufacturer_Name=Bourns, Mouser Part Number=652-CR0603FX-1003GLF, Arrow Part Number=CR0603-FX-1003GLF, Arrow Price/Stock=https://www.arrow.com/en/products/cr0603-fx-1003glf/bourns?region=nac, Datasheet Link=https://www.bourns.com/pdfs/chpreztr.pdf, Height=0.55mm, Manufacturer_Part_Number=CR0603-FX-1003GLF, Mouser Price/Stock=https://www.mouser.com/Search/Refine.aspx?Keyword=652-CR0603FX-1003GLF
S1 S2: library part 4-1437565-2, "Switch", Manufacturer_Name="TE Connectivity", Arrow Part Number=4-1437565-2, Arrow Price/Stock=https://www.arrow.com/en/products/4-1437565-2/te-connectivity?region=europe, Datasheet Link=https://www.te.com/commerce/DocumentDelivery/DDEController?Action=showdoc&DocId=Customer+Drawing%7F2-1437565-7%7FV%7Fpdf%7FEnglish%7FENG_CD_2-1437565-7_V.pdf%7F4-1437565-2, Height=5.38mm, Manufacturer_Part_Number=4-1437565-2
U1 U2 U3 U5 U6 U7 U8: "Undefined or Miscellaneous", Manufacturer_Name=onsemi, Mouser Part Number=512-QRE1113GR, Arrow Part Number=QRE1113GR, Arrow Price/Stock=https://www.arrow.com/en/products/qre1113gr/on-semiconductor?utm_currency=USD&region=europe, Datasheet Link=https://www.onsemi.com/pub/Collateral/QRE1113-D.PDF, Manufacturer_Part_Number=QRE1113GR, Mouser Price/Stock=https://www.mouser.co.uk/ProductDetail/onsemi-Fairchild/QRE1113GR?qs=Qb0BA3xILekkPpSVC5x7uQ%3D%3D

## Free pads (board coordinates)
  round 120 hole 120 mask+2: 1(258,2363) 2(3034,2376) 3(3077,524) 4(733,692)

## Via types
v1: diameter 24, hole 12, L1 to L4, tented both sides, 204 vias

## Nets (pads, with @x,y where several pads share a name; then routed paths per layer and width w, separated by ;. In a path a pad name is that pad's centre, name@x,y a point inside that pad or via, vN(x,y) a via of type N, cw(c..) or ccw(c..) an arc to the next point about the centre after c; other vN are vias at no path point)
5V_USB: BT1.2 C24.1 C27.1 D1.1 J2.4 J2.8 Q2.1 R28.1 R29.1 R33.1 | length 2569.3
  L1 w10: R33.1 824.01,1590.98 824.01,1647.53 851.67,1675.19 C27.1 851.75,1677.08 851.75,1687.2 894.13,1729.58 BT1.2
  L1 w15: R28.1 v1(288.15,800) ; R29.1 v1(288.15,980) ; v1(272.48,730) D1.1 ; v1(376.57,925) J2.8 ; J2.4 v1(703.43,1075) ; Q2.1 749.39,1665.6 R33.1@824.01,1590.98 ; C24.1 v1(775.39,1090) 1114,1428.61 BT1.2@1114,1721.67 ; BT1.2@1090.99,1698.66 BT1.2@1114,1721.67 ; BT1.2 BT1.2@1114,1721.67
  L4 w15: v1(272.48,730) 272.48,732.44 288.15,748.11 v1(288.15,800) v1(288.15,980) 342.07,926.08 375.5,926.08 v1(376.57,925) 465,925 615,1075 v1(703.43,1075) 757.96,1075 772.96,1090 v1(775.39,1090)
+3V3: C1.1 C2.1 C6.1 C7.2 C8.2 C9.2 C11.2 C12.2 C13.2 C14.2 C15.1 C18.1 C22.1 C23.1 IC1.3 IC2.3 IC3.6 IC4.3 R1.2 R2.1 R3.1 R5.1 R10.1 R11.1 R13.1 R15.1 R25.2 R26.2 R30.1 | length 12477.6
  L1 w6: IC1.3 v1(1939.37,135.51) ; v1(2108.5,908) R30.1 ; v1(2143.35,80) C2.1@2200,80
  L1 w10: C6.1@741.06,2001.06 C6.1 ; R1.2 2335.79,208.5 2385.67,158.62 C15.1 2426.93,158.62 2455.55,130 C18.1 2481.81,130 2614.61,262.8 IC3.6
  L1 w15: v1(65,2643) v1@65.4,2642.6 ; v1@163.89,2517.11 v1(164,2517) ; C11.2@163.89,2557.7 C11.2@164,2557.81 ; v1(854.85,229) R25.2 ; C23.1 v1(1264.1,220) ; C22.1@1188.5,83 1188.64,83.14 1260.96,83.14 v1(1261.1,83.28) ; R26.2 1192,439.5 1235.5,439.5 v1(1236,439) ; v1(2143.35,208.5) R1.2
  L1 w16: IC2.3 C6.1@741.06,2001.06
  L1 w20: v1@163.89,2517.11 C11.2@163.89,2557.7 ; R11.1@540,2643.23 540,2587.57 557.57,2570 C12.2 573.78,2529.72 585.5,2518 738.4,2518 v1(863,2642.6) R13.1 938.82,2587.57 956.39,2570 C13.2 ; v1(810,339) 833.6,362.6 IC4.3 ; C13.2@1004,2568.6 1004,2526.57 1021.57,2509 1159.75,2509 v1(1293.35,2642.6) ; R15.1 1350,2587.57 1367.57,2570 C14.2 ; R2.1@1749.09,2630.51 1749.09,2592.42 1771.51,2570 C7.2 ; v1(1939.37,135.51) 1995.79,135.51 v1(2033.35,97.95) ; R3.1 2130,2589 2149,2570 C8.2 ; R5.1 2530,2587.57 2547.57,2570 C9.2 ; 2920,2632.6 2920,2569.78 2920.78,2569
  L1 w25: v1(2033.35,97.95) C1.1
  L1 w30: v1@65.4,2642.6 R10.1 ; v1@483.23,2643.11 537.92,2643.11 R11.1 R11.1@540,2643.23 ; C13.2 C13.2@1004,2568.6 ; v1(1293.35,2642.6) R15.1 ; v1(1671.35,2634) R2.1@1728,2634 ; R2.1 1744.41,2635.2 R2.1@1749.09,2630.51 ; v1(2073.35,2642.6) R3.1 ; v1(2473.35,2645.2) R5.1 ; v1(2863.35,2632.6) 2920,2632.6
  L2 w10: v1(65,2643) 65.11,2643.11 v1@483.23,2643.11 ; v1@163.94,2517.05 163.89,2517 83,2517 62,2496 62,685 104,643 530,643 552,621 552,395 608,339 v1(810,339) 810,273.85 v1(854.85,229) ; v1(164,2517) 465,2517 483.35,2535.35 v1@483.35,2643 ; v1(1236,439) 1236,399.6 1199,362.6 1199,287 1264.1,221.9 v1(1264.1,220) 1264.1,110.28 1336.72,110.28 1411,36 1826.14,36 1832,41.86 1832,120 1933.51,120 1936.69,123.18 1936.69,132.83 v1(1939.37,135.51) v1@1942.05,132.83 ; v1(2033.35,97.95) 2123.11,97.95 2138.71,82.35 2144.98,82.35 2144.98,206.87 v1(2143.35,208.5) 2143.35,259.65 2043,360 2043,842.5 v1(2108.5,908)
  L2 w20: v1(1293.35,2642.6) 1301.94,2634 v1(1671.35,2634) ; 1679.94,2642.6 v1(2073.35,2642.6) ; 2090.92,2686 2432.54,2686 v1(2473.35,2645.2) 2485.94,2632.6 v1(2863.35,2632.6)
  L2 w30: v1@483.23,2643.11 483.35,2643 v1(485.72,2640.63) ; v1(1671.35,2634) 1679.94,2642.6 ; v1(2073.35,2642.6) 2073.35,2668.43 2090.92,2686
  L4 w15: v1(854.85,229) 854.85,172.79 863.64,164 1208.1,164 v1(1264.1,220)
  L4 w20: 741.5,2001.5 863,2123 v1(863,2642.6)
+Vbat: C26.1 IC5.5 J2.5 J3.1 Q2.3 R27.1 | length 5749.2
  L1 w15: v1(157.37,1453.35) R27.1@157.37,1510 ; C26.1 v1(264.61,1150) ; v1(253.35,1482.6) IC5.5 ; v1(342.07,1075) J2.5 ; v1(2503,265) v1@2504,264
  L1 w40: v1(132,1749) J3.1@132,2009.7
  L2 w10: J3.1 310.71,2179.13 436.27,2179.13 v1(527.95,2270.81) ; J3.1@132,1999 v1(132,1749) 132,1478.72 v1(157.37,1453.35) 224.09,1453.35 v1(253.35,1482.6) 253.35,1165.05 264.61,1153.79 v1(264.61,1150) 2282,1150 2343.84,1088.16 2343.84,325.3 v1(2480,189.14) 2480,242 v1(2503,265)
  L2 w15: v1(132,1749) 528.69,1749 574.69,1703
  L4 w6: v1(264.61,1150) 339.61,1075 v1(342.07,1075)
-Vbat: C25.2 IC5.6 J3.2 Q1.1 R31.2 | length 1671.8
  L1 w6: IC5.6 216.1,1445.2 201.33,1459.97 C25.2 201.33,1708.33 230,1737 J3.2 233,1997 291.49,1997 433.89,1854.59 433.89,1665.85 v1(579.75,1520)
  L1 w15: Q1.1 180.51,1318.39 171.72,1327.17 171.72,1355.72 207,1391 301.21,1391 310,1399.79 IC5.6
  L1 w20: R31.2 v1(579.75,1520)
CHG_LED: J2.7 LED1.1 | length 332.2
  L1 w15: LED1.1 158.5,928.07 174.93,944.5 329.5,944.5 360,975 J2.7
CHIP_PU: C3.1 C16.2 IC1.8 R1.1 S2.4 | length 2787.4
  L1 w6: IC1.8 v1(1899.21,292.99) ; v1(2151.46,402.05) 2199.72,402.05 2200,401.76 R1.1 ; S2.4 3059.13,1713.87 3079,1694 3079,1619.41 3079.08,1619.33 C16.2 v1@3127.09,1619.33
  L4 w6: v1(1899.21,292.99) 2029.99,292.99 2136.37,399.37 2148.79,399.37 v1(2151.46,402.05) 2294.05,402.05 2494,602 2494,1429.14 2499.86,1435 2942.76,1435 v1(3128.09,1620.33)
DFET: IC5.1 Q1.6 | length 492.9
  L1 w15: IC5.1 574.21,1445.2 583,1436.41 583,1278 572.2,1267.2 Q1.6
GND: C1.2 C2.2 C3.2 C4.2 C5.2 C6.2 C15.2 C16.1 C17.1 C18.2 C19.2 C21.2 C22.2 C23.2 C24.2 C26.2 C27.2 D2.2 D3.2 D4.2 IC1.1 IC1.2 IC1.11 IC1.14 IC1.36 IC1.37 IC1.38 IC1.39 IC1.40 IC1.41 IC1.42 IC1.43 IC1.44 IC1.45 IC1.46 IC1.47 IC1.48 IC1.49 IC1.50 IC1.51 IC1.52 IC1.53 IC1.54 IC1.55 IC1.56 IC1.57 IC1.58 IC1.59 IC1.60 IC1.61 IC2.1 IC3.7 IC4.2 J1.A1_B12 J1.B1_A12 J1.S1 J1.S2 J1.S3 J1.S4 J2.1 J2.3 J2.9 Q1.3 R23.2 R24.2 R32.2 R33.2 S1.1 S2.1 U1.2 U1.4 U2.2 U2.4 U3.2 U3.4 U5.2 U5.4 U6.2 U6.4 U7.2 U7.4 U8.2 U8.4 | length 4660.3
  L1 w6: v1@130,416.92 D2.2 D2.2@130,469.92 ; D4.2@350,515.59 D4.2 v1@350,568.59 ; D3.2 v1(480,568.59) ; v1(540,867) J2.9@540,959.45 ; v1@732.91,410.67 C21.2 ; v1@833.69,400 IC4.2 IC4.2@886.69,400 ; v1(1318,37.09) 1319.09,36 IC1.61@1375.13,36 ; IC1.60@1367.72,426.35 v1(1367.72,474.6) ; IC1.36 v1(1411,74) ; IC1.37 v1(1442.52,97.52) v1@1443,98 ; v1(1461.87,307.76) IC1.56@1510.13,307.76 ; v1(1462.87,230) IC1.57@1511.13,230 ; IC1.38@1474.02,45.61 v1(1473.99,82.52) ; v1(1473.99,152.24) IC1.50 ; IC1.39@1505.51,45.61 v1(1505.51,96.88) ; IC1.40 v1(1537.01,82.5) ; IC1.41 v1(1568.53,88.98) ; v1(1599.02,104.81) 1599.02,106.85 IC1.51@1599,155.13 ; IC1.42@1600,39.13 v1(1600,73.98) ; IC1.51 IC1.49 ; IC1.55@1600,305.87 IC1.55 1600,354.13 1600,366 v1(1601,367) ; IC1.43@1631.51,39.14 v1(1631.52,97.5) ; IC1.44@1662.99,39.13 v1(1662.99,73.98) ; IC1.53@1678.87,231 v1(1727.13,231) ; IC1.54@1679,308.87 v1(1679,357.13) ; IC1.52@1679.87,151 v1(1728.13,151) ; IC1.45@1694.49,39.13 v1(1694.49,99.56) ; IC1.46@1725.01,34.09 v1(1724.98,71) ; v1(1726,377.87) IC1.14@1726,426.13 ; IC1.47@1756.5,34.09 v1(1756.5,94.52) ; IC1.48@1788.98,41.01 v1(1788.98,70.98) ; v1(1789.87,387) 1831.8,387 IC1.11 ; v1(1793.99,103.02) IC1.2@1830.91,103.04 ; IC1.58 1834.63,35.5 v1(1880.91,35.5) ; IC1.59@1835.72,424.88 v1@1883.97,424.88 ; IC1.1@1844,73 v1(1880.91,73.02) ; v1@1883.97,426.35 1885.43,424.88 v1@1883.97,424.88 ; v1(1884.7,425.61) v1@1883.97,424.88 ; v1(2040.68,42.05) C1.2@2088.93,42.05 ; v1(2151.46,457.95) C3.2@2199.72,457.95 ; C2.2@2201.46,61.34 v1(2249.72,61.34) ; v1(2340.68,102.72) C15.2@2388.93,102.72 ; C17.1 2493,1600.67 v1(2494,1601.67) ; C18.2@2481.46,111.34 v1(2529.72,111.34) ; v1(2641.86,237.2) IC3.7@2690.11,237.2 ; C19.2@3010.28,232.05 v1(3058.54,232.05) ; v1(3031.91,1599.67) 3032.91,1600.67 C16.1
  L1 w10: v1(106.5,1277.2) 109.18,1274.53 132.26,1274.53 139.58,1267.2 Q1.3 ; IC2.1 567.68,1884.02 630.93,1884.02 v1(632,1885.09) ; v1(741,1829) C4.2 936.14,1885.09 942,1890.95 942,1995.64 936.14,2001.5 C6.2 810.32,1989.37 810.32,1977.87 829.94,1958.25 C5.2 ; C27.2 870.33,1675.19 887,1658.52 R33.2 v1(887,1542)
  L1 w20: v1(100.25,1150) C26.2@148.5,1150 ; v1(120,3052) 120,2996.69 U5.4 ; J1.A1_B12@234,313 v1(234,361.25) ; R23.2@240,533.31 v1(240,581.56) ; U5.2 280.54,2922.77 330.23,2922.77 v1(331,2922) ; v1(469.45,2995.43) U6.4 ; J1.B1_A12@485.98,305.17 v1(485.98,353.42) ; R24.2 v1(668.25,521.5) ; J2.1@661,925.75 v1(709.25,925.75) ; J2.3@661,1025 v1(709.25,1025) ; U6.2 733.48,2924.57 734.92,2926 v1(736,2926) ; v1(865,2997) 866.08,2997 867.65,2995.43 U7.4 ; R32.2 v1(939.75,910) ; C24.2@891.5,1090 v1(939.75,1090) ; U7.2 1137.48,2924.57 1138.92,2926 v1(1140,2926) ; C22.2@1129.05,83.28 v1(1129.05,131.54) ; C23.2@1132.05,221.07 v1(1132.05,269.32) ; v1(1263,2997) 1264.08,2997 1265.65,2995.43 U8.4 ; U8.2 1532.48,2924.57 1533.92,2926 v1(1535,2926) ; v1(1673,2995) 1673.22,2995.22 1721.04,2995.22 U1.4 ; U1.2 1879.54,2923.77 1929.23,2923.77 v1(1930,2923) ; v1(1970,2019) 1971.08,2019 1972.08,2018 S1.1@2059,2018 ; v1(2066,2994) 2067.08,2994 2068.52,2995.43 U2.4 ; U2.2 v1(2334,2924.57) ; v1(2465,2997) 2466.08,2997 2467.65,2995.43 U3.4 ; v1@2588.08,2020 S2.1@2675,2020 ; U3.2 2679.14,2924.17 2730.6,2924.17 v1(2731,2923.77)
  L4 w6: v1@1691.81,96.88 v1(1694.49,99.56) v1@1695.46,99.56 ; v1@1724.02,71 v1(1724.98,71) ; v1@1753.83,91.84 v1(1756.5,94.52) ; v1@1786.3,73.65 v1(1788.98,70.98) v1@1791.48,73.48 ; v1@1791.48,100.51 v1(1793.99,103.02) ; v1@1880.91,69.24 v1(1880.91,73.02) ; v1(2340.68,102.72) v1@2343,100.4
  other v1: 832.69,399 731.91,409.67 131,415.92 349,569.59 809,1277 641,1278 699.65,1278 754,1278 867,1288 754,1331 641,1332 699.65,1332 809,1334 870.33,1334 915,1334 754,1378 809,1378 870.33,1378 915,1378 964,1378 641,1380 699.65,1380 915,1428.61 964,1428.61 699.65,1430 754,1430 809,1430 870.33,1430 641,1432 641,1471 699.65,1471 754,1471 809,1471 867,1471 915,1471 964,1476 809,1519 851.75,1519 699.65,1520 981,1538 934,1542 2586,2021
GPIO0: IC1.12 R12.2 | length 3194.5
  L1 w6: R12.2 311.5,2590.5 v1(311,2590) 728,2173 1238,2173 1269,2142 v1(1269,1977) ; IC1.12@1788.98,426.35 1788.98,447.98 v1(1858,517)
  L4 w6: v1(1269,1977) 1290.4,1977 1858,1409.4 v1(1858,517)
GPIO1: IC1.13 R14.2 | length 2724
  L1 w6: v1@721.5,2600.5 R14.2 ; IC1.13@1757.48,426.35 1757.48,491.48 v1(1781,515)
  L2 w10: v1(721,2600) 721,2537 1051,2207 v1@1051,2006
  L4 w6: v1(1050,2009) 1050,1862 1632,1280 1715,1280 v1(1779.5,1215.5) 1781,1214 v1(1781,515)
GPIO2: IC1.5 R16.2 | length 3556.9
  L1 w6: v1@1120.31,2590.5 R16.2 ; v1(1553,1458) 1480,1385 1480,1180 1594,1066 1775,1066 1969,1260 1979,1260 1981.96,1257.04 2005.68,1257.04 v1(2008.36,1254.36) ; IC1.5@1835.72,198.5 v1(1939.37,198.5)
  L2 w10: v1(1119.82,2590) 1119.82,2399.18 1553,1966 v1(1553,1458) ; v1(1939.37,198.5) 2010,269.13 2010,908 v1(1960,958)
  L4 w6: v1(1960,958) 1960,1206 v1(2008.36,1254.36)
GPIO3: IC1.6 R17.2 | length 2801.5
  L1 w6: v1(1521,2590) 1670,2441 v1(1670,2316) ; v1@1521.5,2590.5 R17.2 ; IC1.6@1835.72,230 v1@1885.22,230
  L2 w10: v1(1670,2316) 1670,1346 1690,1326 1840,1326 v1(1900,1266) ; v1(1885.72,229.5) 1915.5,229.5 1989,303 1989,809 v1(1935,863)
  L4 w6: v1(1900,1266) 1900,898 v1(1935,863)
GPIO4: IC1.18 R4.2 | length 2570.8
  L1 w6: IC1.18@1600,426.35 1600,541 v1(1620,561) ; v1@1911.5,2580.5 R4.2
  L2 w10: v1@1494,2395 1726,2395 v1(1911,2580) ; v1(1497,2394) 1497,2092 1621,1968 v1(1621,1213)
  L4 w6: v1(1620,561) 1621,562 v1(1621,1213)
GPIO5: IC1.19 R6.2 | length 2597.6
  L1 w6: IC1.19@1568.5,426.35 1568.75,426.59 1568.75,497.75 v1(1569,498) ; v1(1568.76,1275.55) 1836,1542.79 v1(1836,2105)
  L1 w15: R6.2 v1(2358.15,2640)
  L2 w15: v1(1836,2105) 1837.72,2106.72 1837.72,2119.57 v1(2358.15,2640)
  L4 w6: v1(1568.76,1275.55) 1568.88,1275.43 1568.88,498.12 v1(1569,498)
GPIO6: IC1.20 R8.2 | length 2865.6
  L1 w6: IC1.20 1538.5,424.41 1538.5,581.5 v1(1540,583) ; v1(1543.5,1198.5) 1929,1584 v1@1929,2103 ; v1@2701.5,2590.5 R8.2
  L2 w10: v1(1929,2105) 1932.79,2105 2417.79,2590 v1(2701,2590)
  L4 w6: v1(1540,583) 1541.75,584.75 1541.75,1196.75 v1(1543.5,1198.5) v1@1544,1199
GPIO7: IC1.21 IC3.1 | length 5794
  L1 w6: v1(1492,1113) 1488.21,1113 1407,1194.21 1407,2135 1483,2211 2722,2211 v1(3091,2580) ; IC1.21@1505.51,426.35 1507.26,428.09 1507.26,505.26 v1(1509,507) 1509,559.18 1504,564.18 1504,611.49 1507.51,615 1920.49,615 1929,606.49 1929,336 2114,151 2211.81,151 2304.81,58 2759.5,58 2781.5,80 2931.14,80 2937,85.86 2937,201 2926.39,211.61 IC3.1 ; v1@3091.5,2580.5 3091.5,2630
  L4 w6: v1(1492,1113) 1492,527.79 1509,510.79 v1(1509,507)
GPIO9: C17.2 IC1.23 R30.2 S1.4 | length 2320.9
  L1 w6: v1(1420,503) 1442.52,480.48 IC1.23@1442.52,426.35 ; R30.2 v1(2171.5,989.65) 2171.5,1386.83 2404,1619.33 C17.2@2439.21,1619.33 ; S1.4 2439.13,1619.41 C17.2@2439.21,1619.33 ; C17.2 C17.2@2439.21,1619.33
  L2 w10: v1(1420,503) 1397,526 1397,834 1590,1027 2134.14,1027 v1(2171.5,989.65) v1@2172,989.14
NetBT1_1: BT1.1 C4.1 C5.1 IC2.2 Q2.2 | length 1005
  L1 w6: Q2.2 Q2.2@673.12,1740.4 ; C5.1 742.41,1939.59 C4.1 740,1942 737.67,1942 681.93,1886.26 681.93,1749.21 Q2.2@673.12,1740.4 ; BT1.1 1000.02,1891 849.43,1740.4 Q2.2@673.12,1740.4
  L1 w15: IC2.2 C4.1@737.67,1942
NetC7_1: C7.1 R4.1 U1.3 | length 575.3
  L1 w20: C7.1 1818.11,2570.39 1848.19,2600.47 1848.19,2629.68 R4.1
  L1 w30: R4.1 1848.5,2714 1975,2840.5 1975,2976 1955.57,2995.43 U1.3
NetC8_1: C8.1 R6.1 U2.3 | length 581.9
  L1 w20: C8.1 2208.11,2608.62 R6.1@2238.5,2639.02
  L1 w30: R6.1@2238.5,2639.02 R6.1 2238.5,2720.5 2376,2858 2376,2977.86 2358.43,2995.43 U2.3
NetC9_1: C9.1 R8.1 U3.3 | length 568.6
  L1 w30: C9.1 2638.5,2600.39 R8.1 2635.79,2642.72 2635.79,2696.79 2765,2826 2765,2977.86 2747.43,2995.43 U3.3
NetC11_1: C11.1 R12.1 U5.3 | length 619.1
  L1 w30: C11.1 230.93,2560 248.5,2577.57 R12.1 248.5,2716.5 380,2848 380,2977.86 362.43,2995.43 U5.3
NetC12_1: C12.1 R14.1 U6.3 | length 620.8
  L1 w30: C12.1 655.79,2615.79 655.79,2646.3 658.5,2649.02 R14.1 658.5,2728.79 804,2874.28 804,2977.86 786.43,2995.43 U6.3
NetC13_1: C13.1 R16.1 U7.3 | length 596.1
  L1 w6: C13.1 1045.63,2576.81 1045.63,2594.61 1057.32,2606.3 R16.1
  L1 w30: R16.1 1057.32,2687.32 1195,2825 1195,2977.86 1177.43,2995.43 U7.3
NetC14_1: C14.1 R17.1 U8.3 | length 577.5
  L1 w20: C14.1 1438.11,2570.39 1463,2595.28 1463,2635.5 R17.1
  L1 w30: R17.1 1458.5,2731 1510.5,2783 1579,2851.5 1579,2977.86 1561.43,2995.43 U8.3
NetC19_1: C19.1 IC3.2 IC3.3 | length 169.4
  L1 w6: IC3.2 IC3.3 2933.33,262.8 2958.48,287.95 C19.1
NetC20_1: C20.1 R19.1 | length 438.5
  L1 w6: C20.1 2540.34,441.34 2553,454 2553,553.21 2561.79,562 2736,562 2751.5,577.5 R19.1
NetC20_2: C20.2 C21.1 IC4.1 | length 1989.6
  L1 w6: C21.1 C21.1@780.42,429.33 ; IC4.1 789.88,437.4 781.81,429.33 C21.1@780.42,429.33 ; C20.2 2446,460 2278,628 1210.86,628 1070.86,488 781,488 780.5,487.5 780.5,429.41 C21.1@780.42,429.33
NetC25_1: C25.1 R27.2 | length 206.3
  L1 w6: R27.2 80.6,1570.12 182.67,1672.19 C25.1
NetD1_2: D1.2 D2.1 J1.A4_B9 J1.B4_A9 | length 1105.6
  L1 w15: J1.B4_A9 454.49,286.38 450.18,282.07 450.18,274.15 449.3,273.28 449.3,268.56 411.74,231 312,231 282.93,260.07 279.19,260.07 269.82,269.43 269.82,292.7 J1.A4_B9 265.51,367.22 189.72,443 189.72,507.2 180.94,515.98 D2.1 130,643 151,664 449,664 470.87,685.87 D1.2
NetIC3_4: IC3.4 R20.1 R21.1 | length 341.5
  L1 w6: IC3.4 2880,291.77 R21.1 R20.1@2880,628.5
NetIC3_5: IC3.5 LS1.P R22.2 | length 849.2
  L1 w6: v1@2649,944 v1(2649.7,944.7) v1@2650.39,945.39 ; v1(2686,529) 2685.51,528.51 R22.2 2685.51,479.02 2652.54,446.04 2652.54,294.24 2658.4,288.39 IC3.5
  L1 w15: v1@2650.39,945.39 LS1.P
  L4 w15: v1(2649.7,944.7) 2649.7,565.3 v1(2686,529)
NetIC3_8: IC3.8 LS1.M | length 1380.6
  L1 w6: v1(2616,194) 2633.61,211.61 IC3.8 ; v1@2949.61,954.39 v1(2951,953)
  L1 w15: v1@2949.61,954.39 LS1.M
  L4 w15: v1(2616,194) 2579,194 2561,212 2561,351.21 2569.79,360 2934,360 2951,377 v1(2951,953)
NetIC5_2: IC5.2 R31.1 | length 112.9
  L1 w6: IC5.2 374.59,1481 430.49,1481 468.5,1519.02 R31.1
NetIC5_3: IC5.3 Q1.4 | length 554.8
  L1 w6: IC5.3 v1(373,1570)
  L1 w10: v1(159,1234) 162.79,1234 170.4,1241.61 Q1.4
  L4 w6: v1(159,1234) 341.5,1416.5 341.5,1539.69 371.81,1570 v1(373,1570)
NetJ1_A5: J1.A5 R23.1 | length 190.8
  L1 w6: R23.1 240,424.21 310.79,353.42 J1.A5
NetJ1_B5: J1.B5 R24.1 | length 282.5
  L1 w6: J1.B5 428.9,338.9
  L1 w15: 428.9,338.9 477,387 547.51,387 619.02,458.5 R24.1
NetJ2_2: J2.2 R32.1 | length 208.7
  L1 w15: J2.2 710.39,975 775.39,910 R32.1
NetLED1_2: LED1.2 R28.2 | length 112.5
  L1 w15: R28.2 168.5,800.98 178.72,811.2 179.7,811.2 221.5,852.99 LED1.2
NetLED2_2: LED2.2 R29.2 | length 163.5
  L1 w15: LED2.2 126.86,1060 118.07,1051.21 118.07,986.71 126.86,977.93 166.43,977.93 R29.2
NetQ1_2: Q1.2 Q1.5 | length 807.3
  L1 w15: v1(118,1327.17) 152.38,1292.8 Q1.2 ; Q1.5 486.85,1241.61 527.74,1200.72 531.28,1200.72 v1(533,1199)
  L4 w15: v1(118,1327.17) 80,1289.17 80,1207.79 88.79,1199 v1(533,1199)
NetR2_2: R2.2 U1.1 | length 350.9
  L1 w30: U1.1 1668.57,2924.57 1651,2906.99 1651,2731.57 1668.57,2714 1736,2714 R2.2
NetR3_2: R3.2 U2.1 | length 354.6
  L1 w30: U2.1 2057.57,2924.57 2040,2906.99 2040,2740.57 2058.49,2722.09 2125.31,2722.09 R3.2
NetR5_2: R5.2 U3.1 | length 364.7
  L1 w30: U3.1 2453.57,2924.57 2435,2906 2435,2737.57 2452.57,2720 R5.2
NetR10_2: R10.2 U5.1 | length 214.9
  L1 w15: U5.1 121.26,2836.74 140,2818 R10.2
NetR11_2: R11.2 U6.1 | length 316.6
  L1 w15: U6.1 478.24,2924.57 469.45,2915.78 469.45,2728.79 478.24,2720 R11.2
NetR13_2: R13.2 U7.1 | length 320.3
  L1 w30: U7.1 920.71,2924.01 880.57,2924.01 863,2906.44 863,2734.98 880.57,2717.4 R13.2
NetR15_2: R15.2 U8.1 | length 355.5
  L1 w30: U8.1 1320.71,2924.01 1268.57,2924.01 1251,2906.44 1251,2734.98 1268.57,2717.4 R15.2
NetR19_2: R19.2 R20.2 | length 230.7
  L1 w6: R19.2 2686,632.5 2686,676.14 2691.86,682 2812.65,682 2818.5,676.14 R20.2
NetR21_2: R21.2 R22.1 | length 68.5
  L1 w15: R22.1 R21.2
SCL: IC1.22 IC4.5 R26.1 | length 689.7
  L1 w6: IC4.5 1089.49,400 1128.5,439.02 R26.1 1128.5,440.98 1253.52,566 v1(1449,566) 1474.02,540.98 IC1.22@1474.02,426.35
SDA: IC1.16 IC4.4 R25.1 | length 1543.2
  L1 w6: R25.1 v1(1013,229) 1046.14,262.14 v1(1046.14,362.6) IC4.4 ; v1(1146,702) 1431.21,702 1445.21,716 v1(1449,716) ; IC1.16@1662.99,426.35 1662.99,453.99 v1(1687,478)
  L2 w10: v1(1046.14,362.6) 1146,462.46 v1(1146,702) ; v1@1447,716 v1(1449,716) 1726,716 1732,710 1732,521 1689,478 v1(1687,478)
STBY_LED: J2.6 LED2.1 | length 227.9
  L1 w15: LED2.1 287,1060 324,1023 431.23,1023 J2.6
USB_D_N: D4.1 IC1.26 J1.A7 J1.B7 | length 1453.6
  L1 w6.03: J1.B7@333.36,294.12 J1.B7 330.47,325.76 334.18,329.46 369.67,329.46 369.84,329.29 ; D4.1 v1(350,434.88) 397.31,434.88 407.98,424.21 407.98,380.49 369.84,342.34 369.84,329.29 ; J1.A7@366.95,294.12 J1.A7 369.84,329.29 ; v1(1300.79,307.76) 1301.35,307.76 1318.08,324.49 1364.28,324.49
  L4 w6.03: v1(350,434.88) 374.28,434.88 433.73,375.43 509.02,375.43 621.49,262.97 710.81,262.97 747.25,299.41 1221.25,299.41 1264.1,342.26 1269.1,342.26 1300.79,310.57 v1(1300.79,307.76)
USB_D_P: D3.1 IC1.27 J1.A6 J1.B6 | length 1394.9
  L1 w6.03: J1.A6@353.05,299.9 J1.A6 353.05,294.12 353.05,271.29 359.79,264.55 384.65,264.55 389.53,269.43 J1.B6 389.53,342.19 422.02,374.68 422.02,424.21 432.69,434.88 v1(480,434.88) D3.1 ; v1(1309,355.98) 1367.72,355.98
  L4 w6.03: v1(480,434.88) 443.11,397.99 443.11,393 446.64,389.46 514.83,389.46 627.3,277 705,277 741.44,313.44 1215.44,313.44 1258.29,356.29 1308.69,356.29 v1(1309,355.98)
pads on no net: IC1.4 IC1.7 IC1.9 IC1.10 IC1.15 IC1.17 IC1.24 IC1.25 IC1.28 IC1.29 IC1.30 IC1.31 IC1.32 IC1.33 IC1.34 IC1.35 IC2.4 IC4.6 IC5.4 J1. J1.A8 J1.B8 Q1.7 Q1.8 S1.2 S1.3 S2.2 S2.3
copper on no net: | length 1094.9
  L1 w6: v1(2666.82,80) 2715.07,80
  L1 w15: v1(2849,2995.43) 2901.26,2995.43
  L1 w20: 2957,2569 2968.49,2569 3028.5,2629.02 ; 3058.74,2924.57 3058.96,2924.78 3115.78,2924.78 v1(3116,2925)
  L1 w30: 2901.26,2924.57 2858.57,2924.57 2841,2906.99 2841,2724.98 2858.57,2707.4 2920,2707.4 ; 3028.5,2629.02 3028.5,2630 3028.5,2721.5 3155,2848 3155,2977.86 3137.43,2995.43 3058.74,2995.43

## Polygon pours and split planes (outlines as drawn)
GND on L2 "NONET_L02_P017" (solid, shelved, pour order 17): 36,3184 42,3178 3170,3178 3170,16 3172,14 3170,12 26,12
+3V3 on L2 "NONET_L02_P013" (solid, shelved, pour order 13): 2184,9 2184,263 2064,383 2064,844.47 2134.02,914.49 2114.25,934.25 2031,851 2031,151 1633,151 1321.54,462.46 1219.06,462.46 1219.06,399.06 1185,365 1185,9
+3V3 on L2 "NONET_L02_P012" (solid, shelved, pour order 12): 506,2671 526,2651 526,2472 87,2472 85,2470 85,699 124,660 594,660 594,402 615,381 812.85,381 880,313.85 880,181 786,181 783,178 640,321 565,321 565,339 510,394 510,619 94,619 31,682 35,686 35,2671
+3V3 on L2 "NONET_L02_P011" (solid, shelved, pour order 11): 1288,2613 1288.07,2613.07 2090.92,2613.07 2090.92,2629.92 2125,2664 2127,2662 2434,2662 2481,2615 2888,2615 2888,3194 2876,3182 1280,3182 1280,2674 1276,2670 1276,2613
no net on Top Solder (Board Layer Stack) "Default Coverlay 1 Top" (split plane): 0,0 3200,0 3200,3200 0,3200
+3V3 on L4 "NONET_L04_P015" (solid, shelved, pour order 15): 813,2769 30,2769 15,2754 18,2751 18,1829 373.72,1829 995.39,2641.85
+3V3 on L4 "NONET_L04_P014" (solid, shelved, pour order 14): 814,243 805,234 805,1 1290,1 1290.39,1.39 1290.39,243.29
5V_USB on L1 "NONET_L01_P019" (solid, shelved, pour order 19): 1011,1562.5 1011,1389.5 1009,1389.5 870,1250.5 619,1250.5 619,1506.78 739,1562.5
no net on L1 "NONET_L01_P009" (solid, shelved, pour order 9): 1815,402 1814,402 1813,401 1814,400 1814,401 1813,401 1815,399
GND on L1 "NONET_L01_P008" (solid, shelved, pour order 8): 1808,400.5 1393,400.5 1393,59.64 1404.64,48 1808,48
+3V3 on L1 "NONET_L01_P003" (solid, shelved, pour order 3): 182.17,2541.49 181.19,2542.47 181.19,2548.55 177.57,2552.17 177.57,2566.88 177.21,2567.23 177.21,2578.11 172.54,2578.11 172,2577.57 172,2669 44,2669 38,2663 38,2619 44,2613 44.07,2613.07 140,2613.07 144,2609.07 144,2549 128,2533 128,2506 147,2487 174,2487 191,2504 191,2529
+3V3 on L1 "NONET_L01_P002" (solid, shelved, pour order 2): 803,379 773,349 773,277 829,221 829,185 866,148 938,148 938,266.32 911.5,292.82 911.5,379
+3V3 on L1 "NONET_L01_P001" (solid, shelved, pour order 1): 1300.14,262.14 1300.79,261.5 1300.79,35.12 1161.12,35.12 1160,34 1159,35 1159,262.14
+3V3 on L1 "NONET_L01_P000" (solid, shelved, pour order 0): 2117.65,64.88 2120.83,64.88 2132.22,53.48 2171.25,53.48 2171.25,60.81 2179.79,71.51 2231,71.48 2231,131 2266.41,175.35 2266.41,243.48 2142.17,243.48 2063.41,164.72 1926.41,164.72 1908.41,156.92 1908.41,70.72 2040.76,70.72 2106,65.77 2106.27,65.49
no net on Bottom Solder (Board Layer Stack) "Default Coverlay 1 Bottom" (split plane): 0,0 3200,0 3200,3200 0,3200
GND on L3 (split plane): 3199.95,0.05 0.05,0.05 0.05,3199.95 3199.95,3199.95

## Silkscreen, mask and mechanical layers (free items; w line width, h text height)
Top Overlay:
  text "IR3" at 955,3085 h40
  text "IR7" at 2552,3085 h40
  text "IR5" at 1754,3084 h40
  text "IR4" at 1356,3083 h40
  text "IR8" at 2934,3083 h40
  text "IR2" at 560,3082 h40
  text "IR6" at 2152,3082 h40
  text "IR1" at 161,3080 h40
  text "BAT CONN" at 44,2184 h40
  text "3V3" at 575,2159 h40
  text "+" at 120,1851.11 h40
  text "-" at 251.99,1849 h40 r90
  text "REG" at 478,1797 h40
  text "SPEAKER" at 2681,684 h40
  text "DAC" at 856,515 h40
  text "ESP32-C3-MINI-1-N4" at 1280,497 h40
  text "MAGNIFIER" at 2634,348 h40
  text "USB_CHG" at 586,46.66 h40
Bottom Overlay:
  drawing of 158 lines, arcs and shapes, not listed
  text "YANGTSE RIVER TOY" at 2305.79,1305 h80
  text "2025 V1.01" at 2088.88,1151 h80
  text "-" at 2965,918.01 h60
  text "+" at 2667,912 h60
  text "KONGPO BHU LOBSANG" at 1721,532.34 h120 r270
  text "USB_CHG" at 642.58,428.33 h80
  text "FREE TIBET" at 3143.88,57 h80
Board Shape:
  lines w20: 11.02,-11.02 3200,-11.02 3200,3200 0,3200 0,0 0,-11.02 26,-11.02

## Text inside footprints (layer, text, board x,y; h text height)
J1: Mechanical 13 "PCB EDGE" at 564.72,35.2 h24
LS1: Top Overlay "+" at 2440.26,1060 h50.18; Top Overlay "-" at 3116.16,1054.99 h50.19